# EAGLE board fmc-host - panel (EAGLE 9.5.1), part 1 of 10
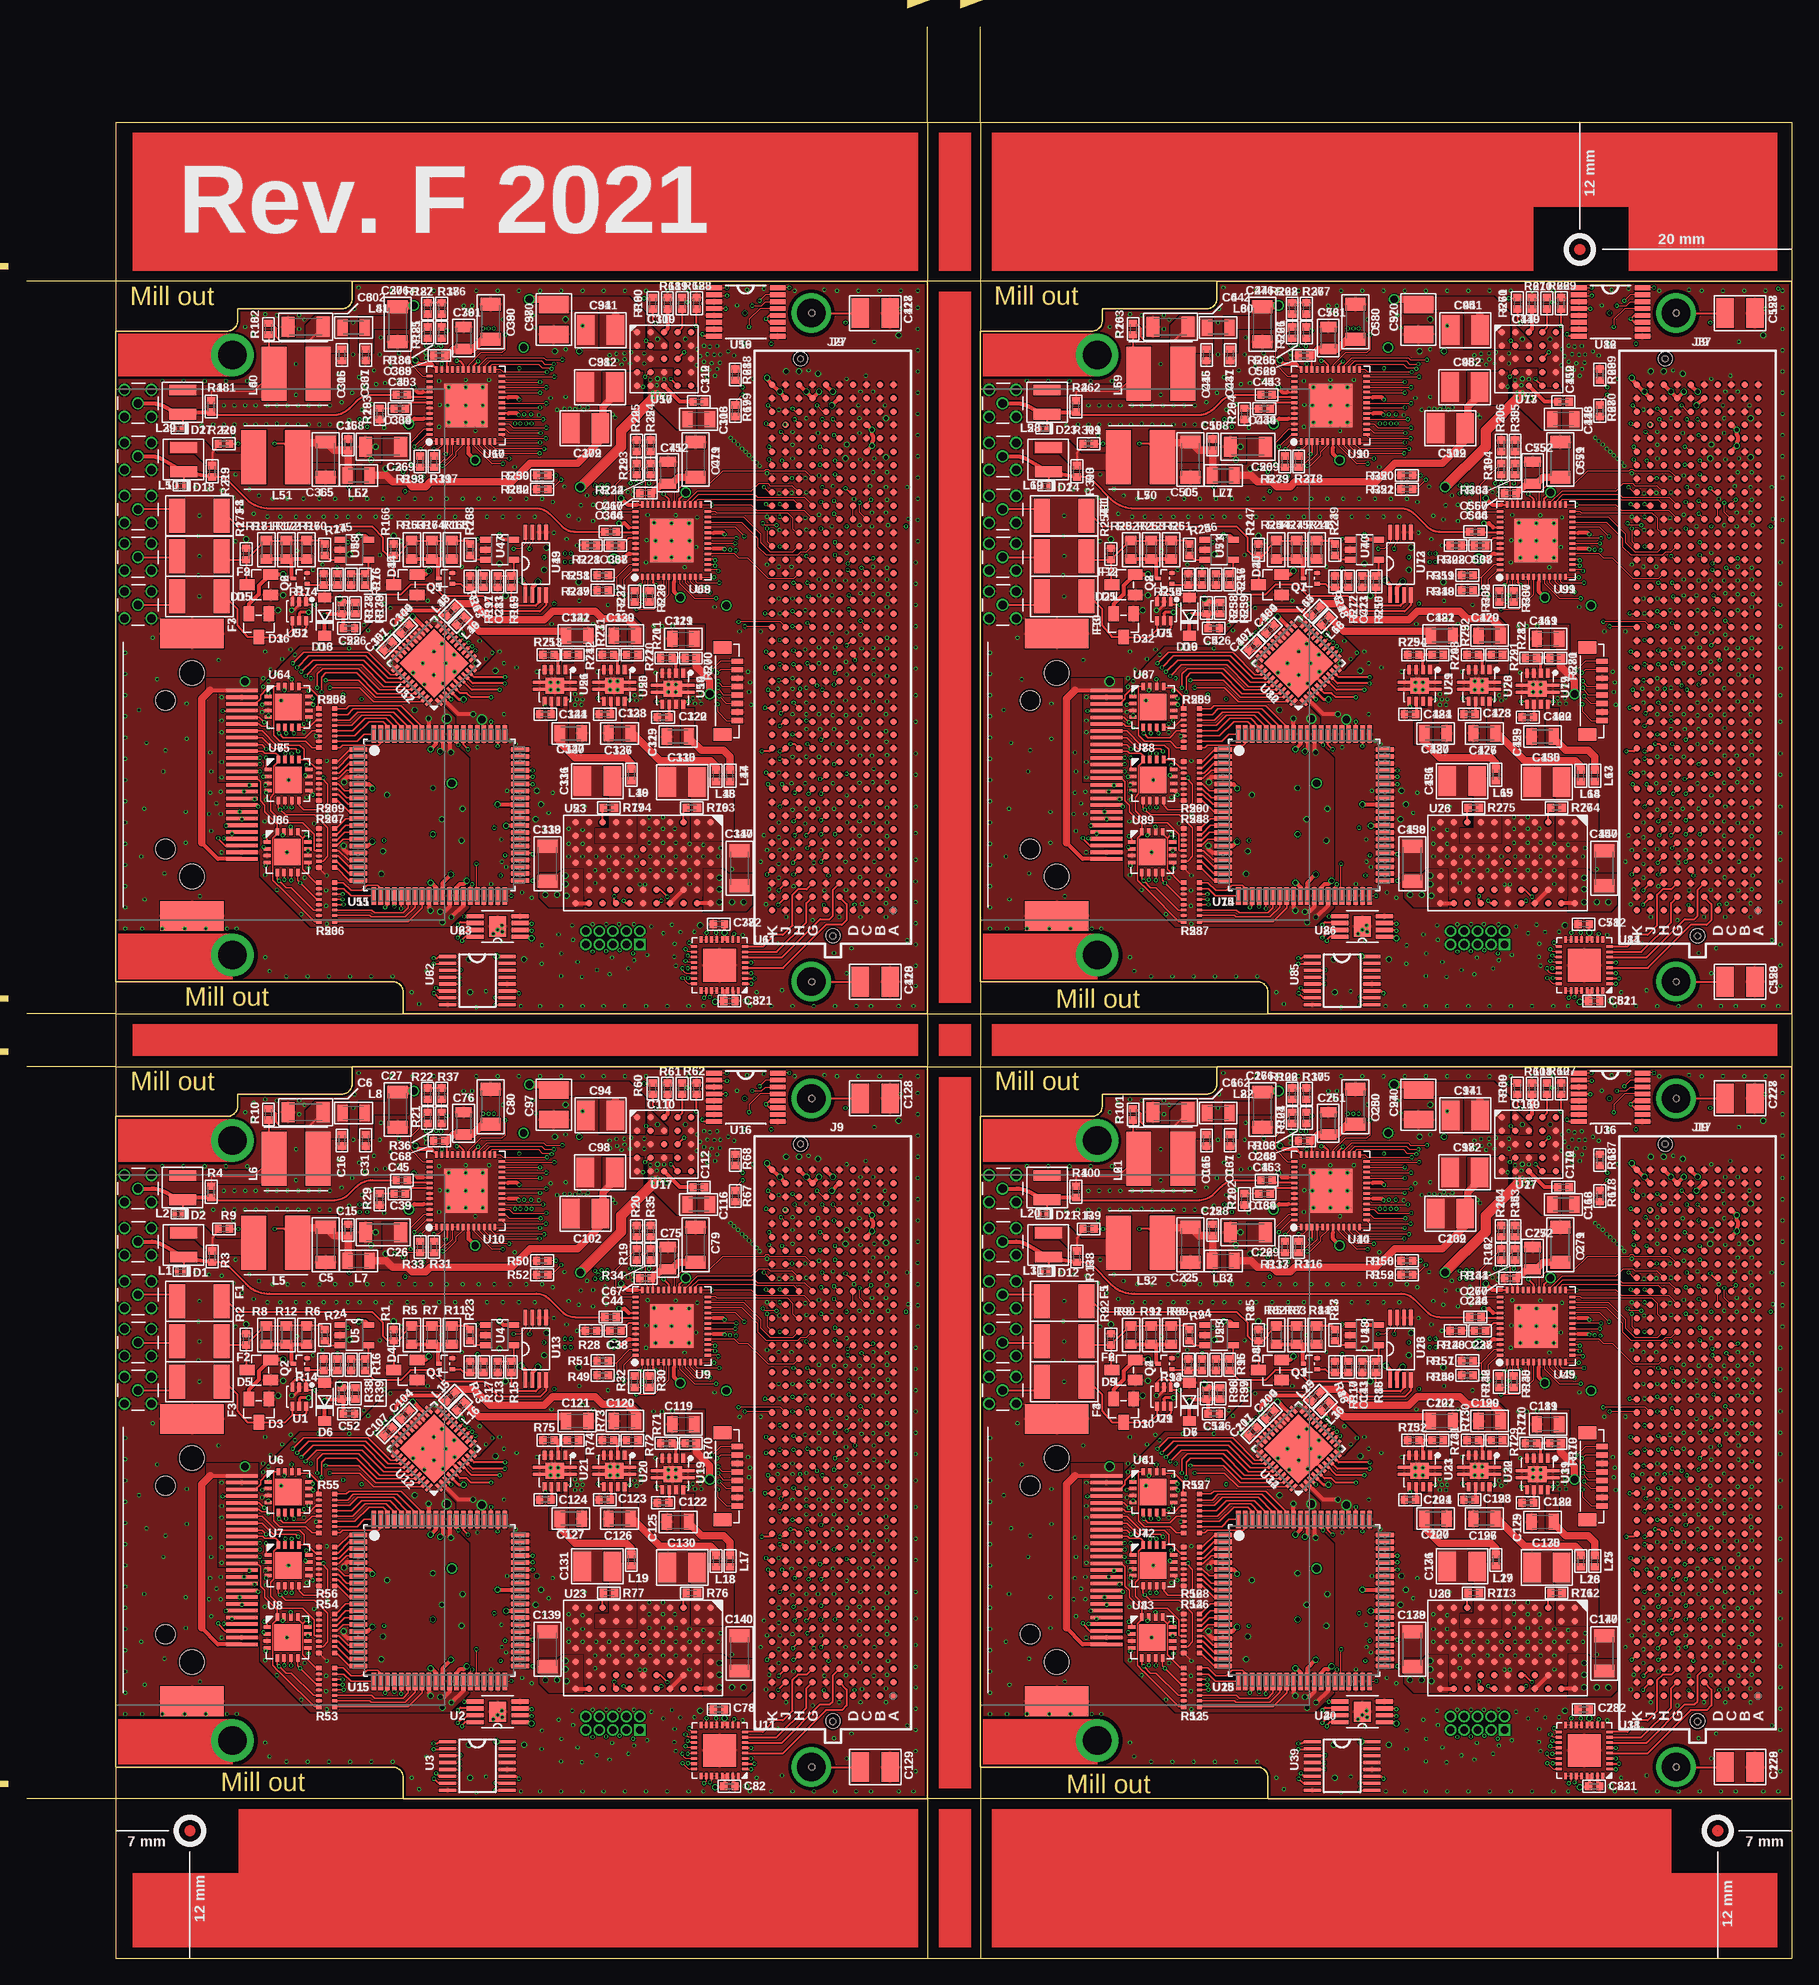
[diagram p0: board, top side]
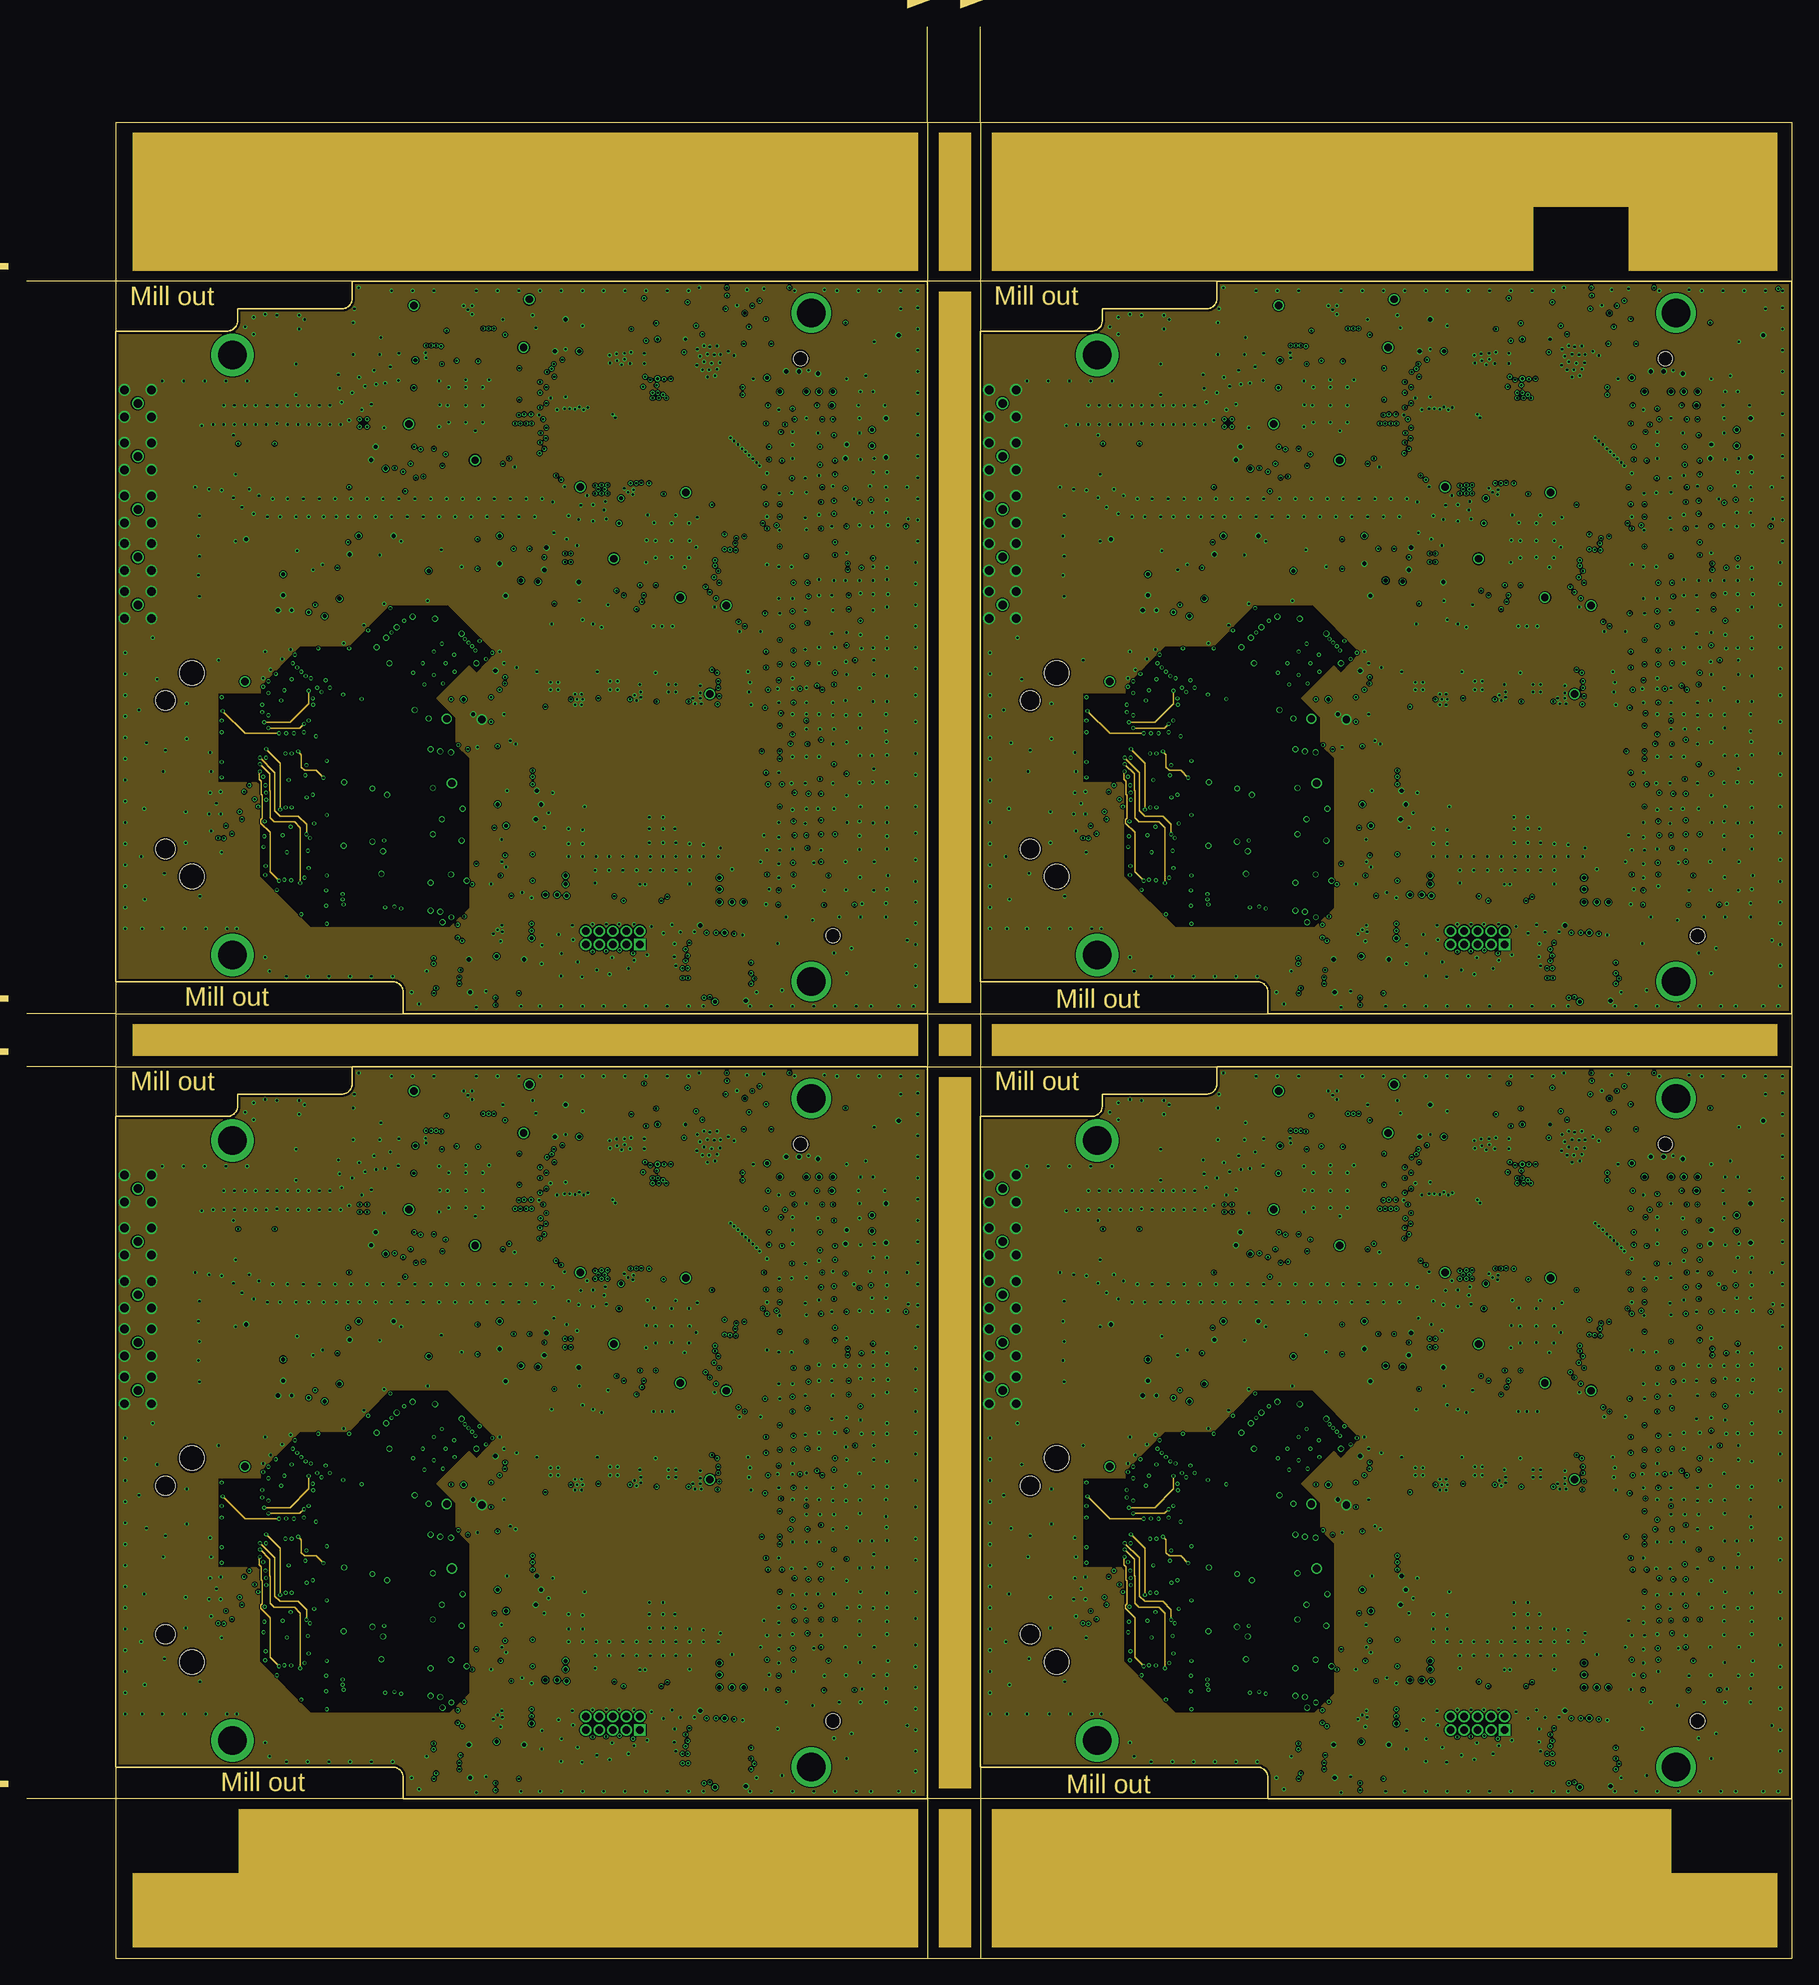
[diagram p1: board, inner layer GND1]
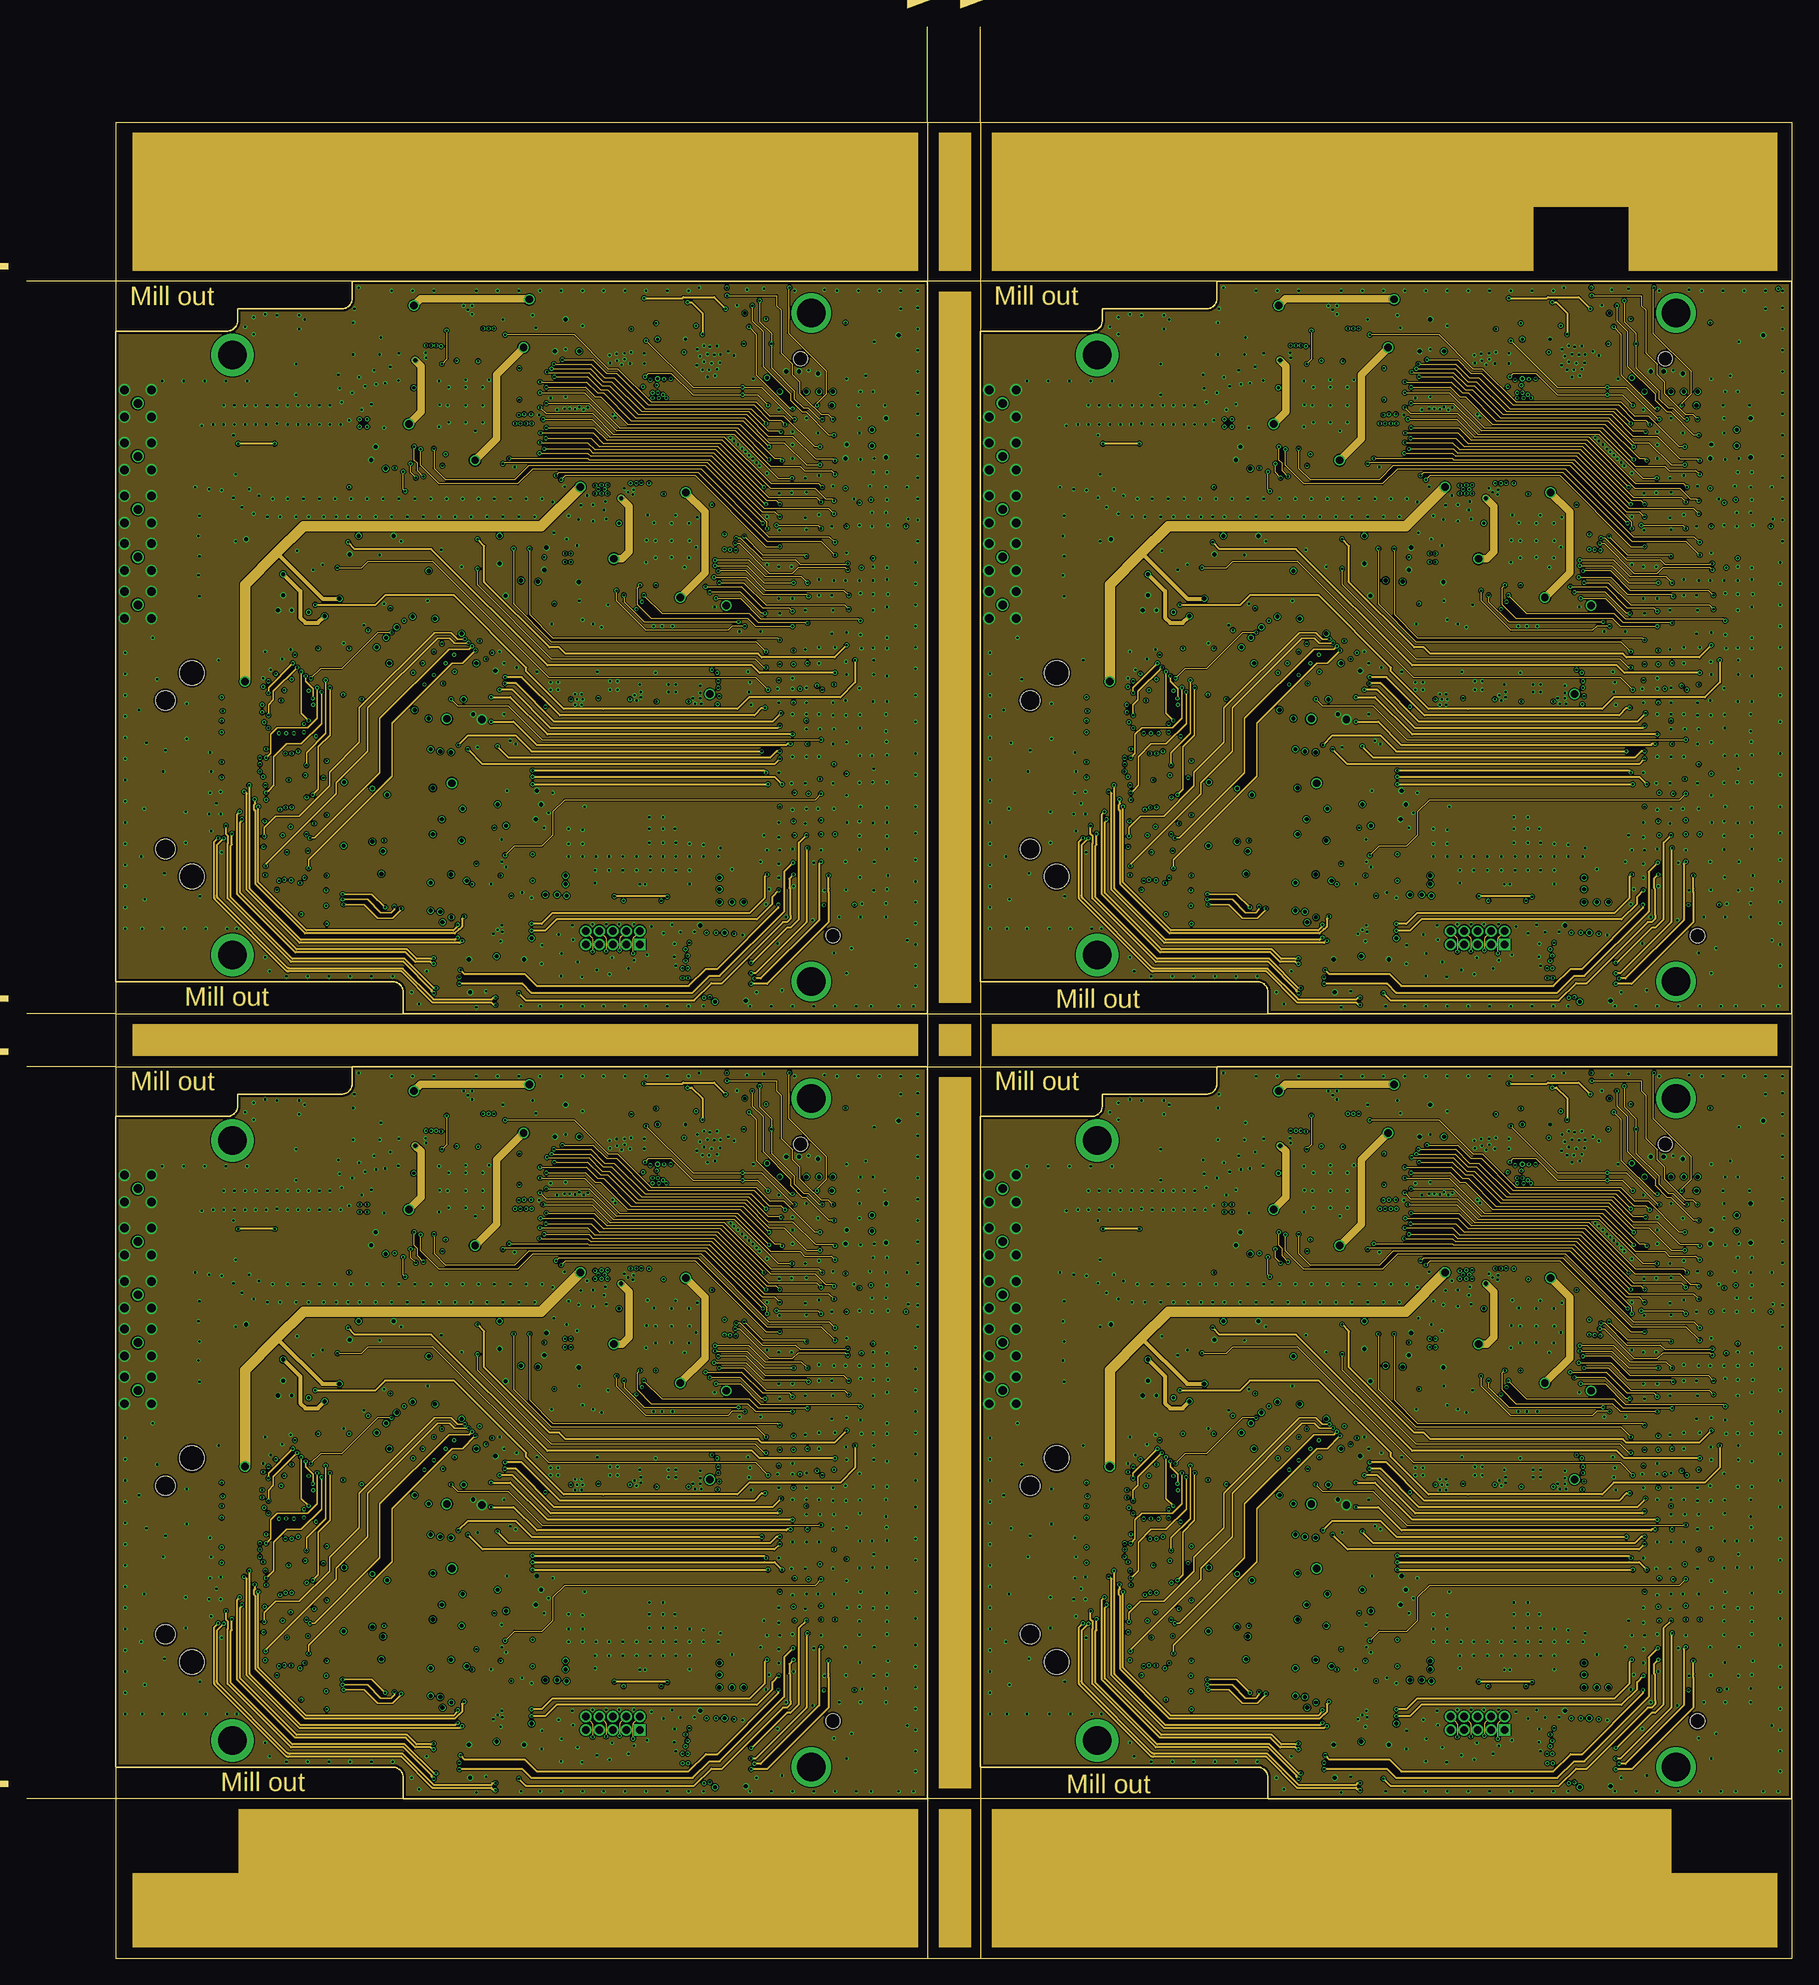
[diagram p2: board, inner layer Highspeed2]
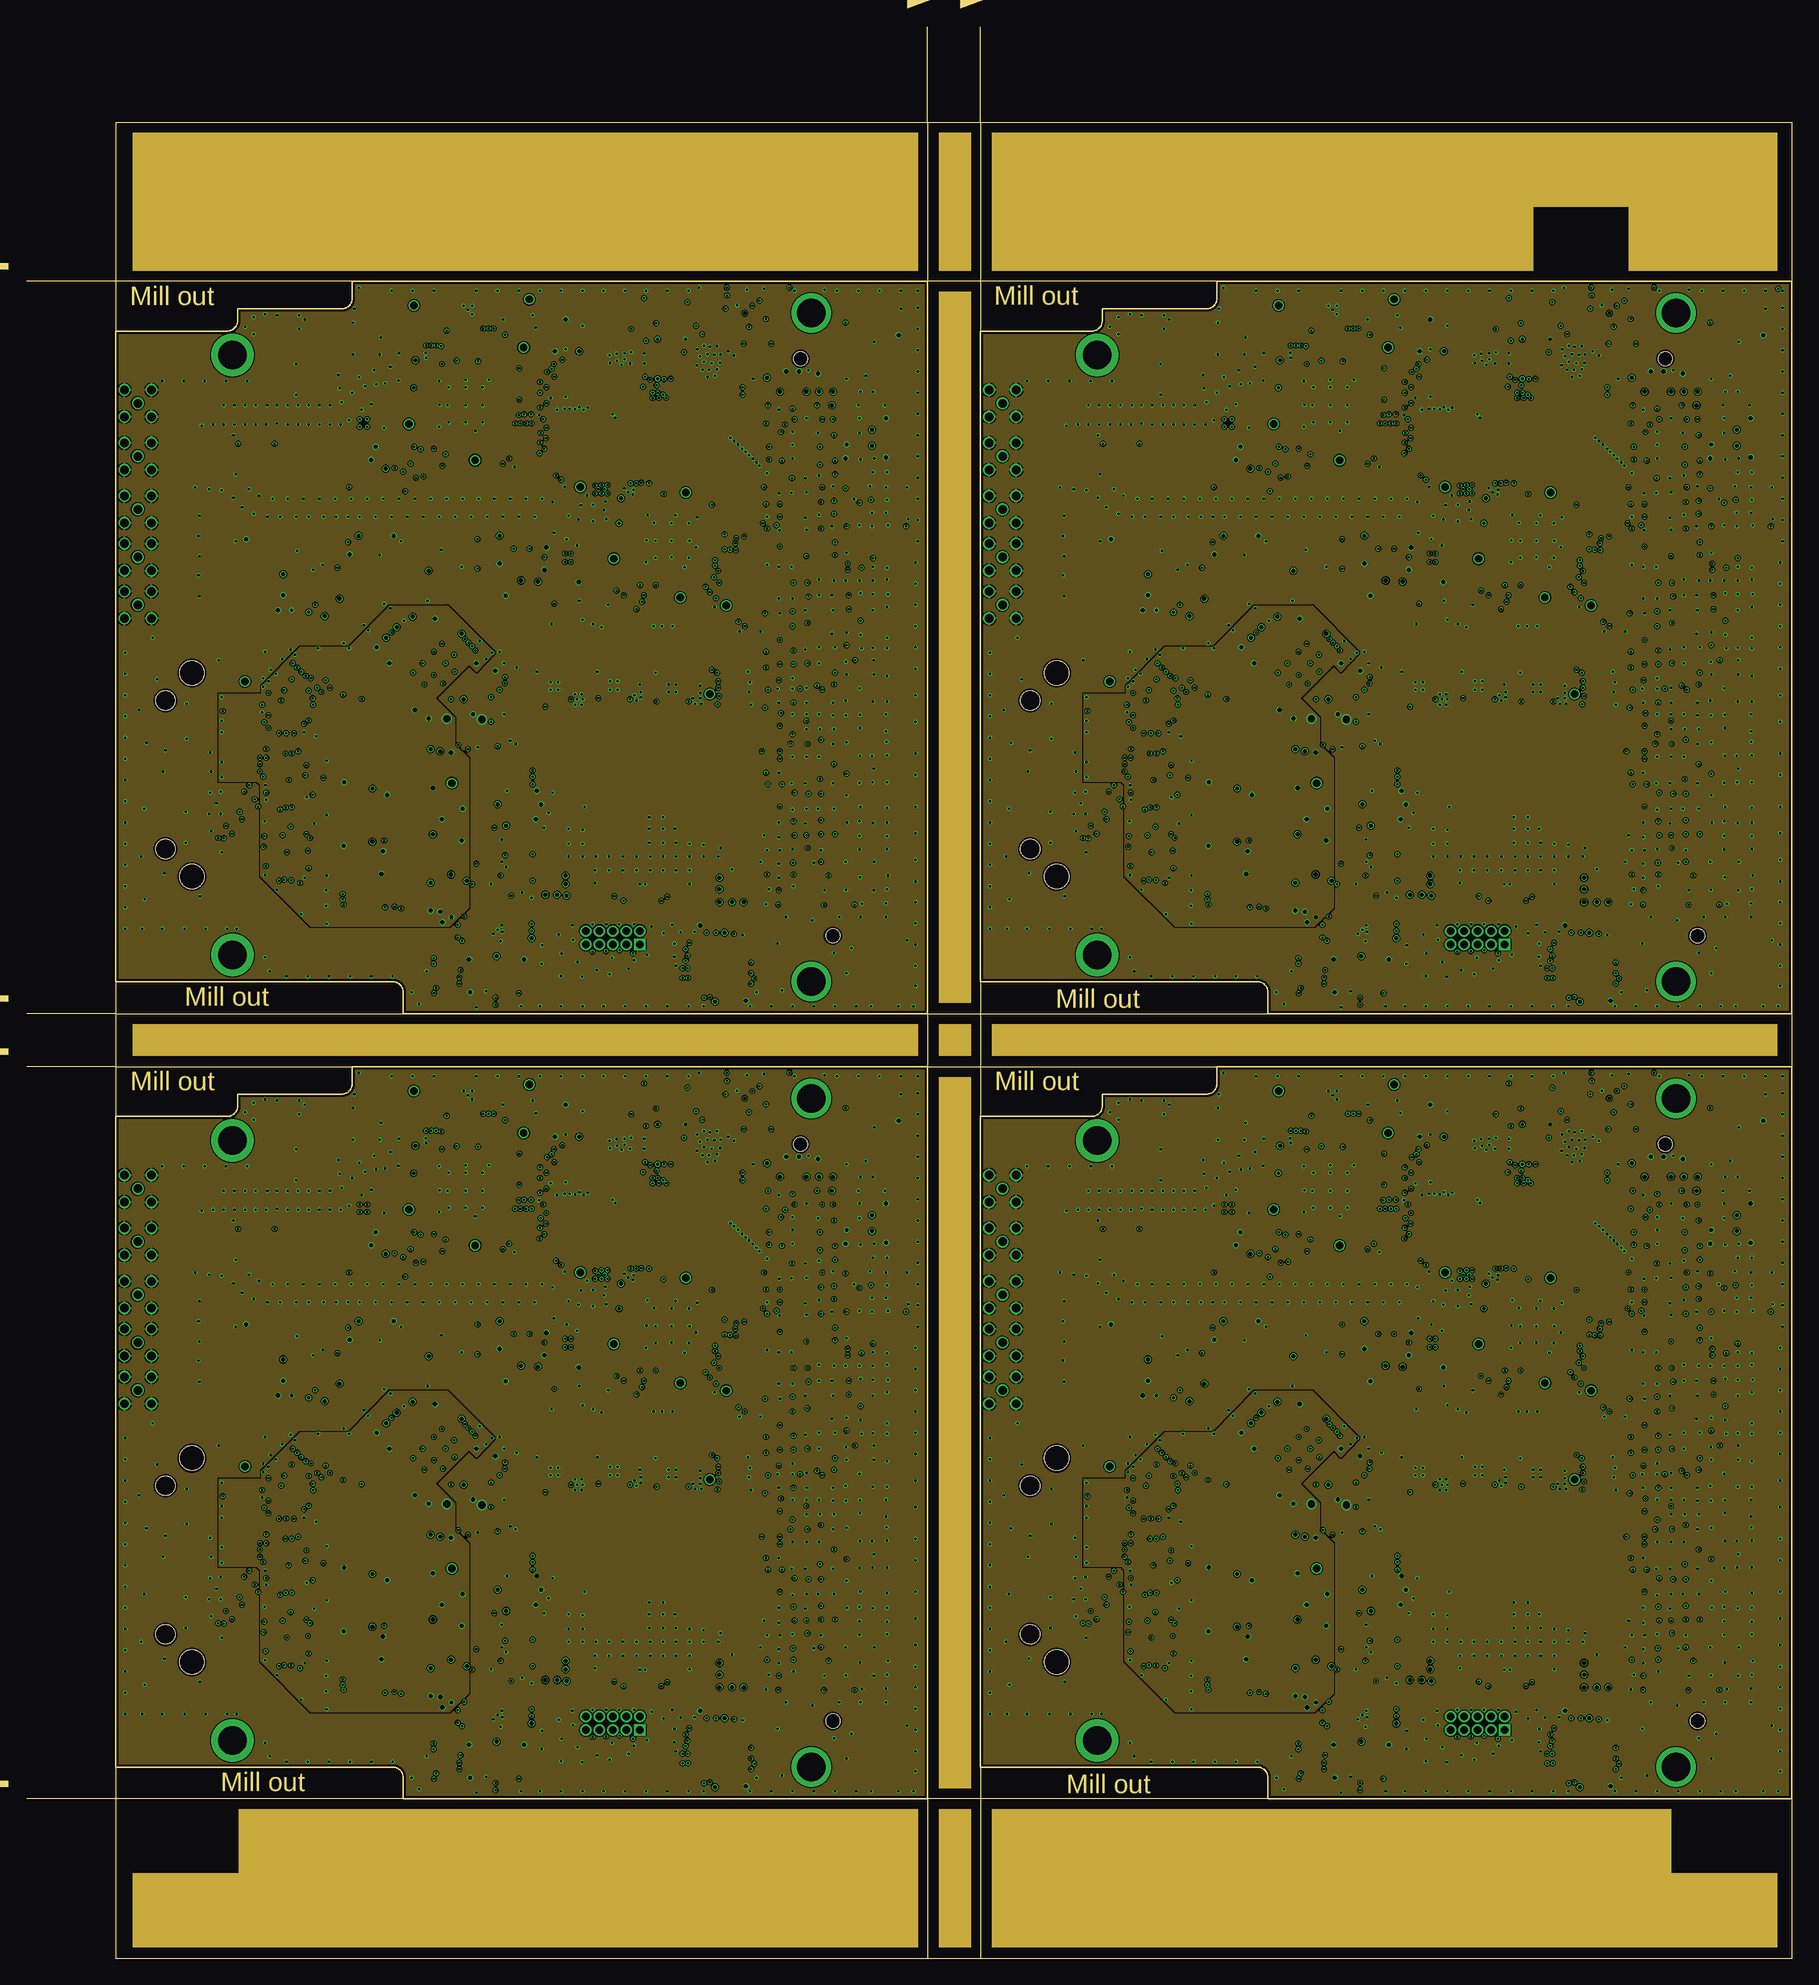
[diagram p3: board, inner layer GND3]
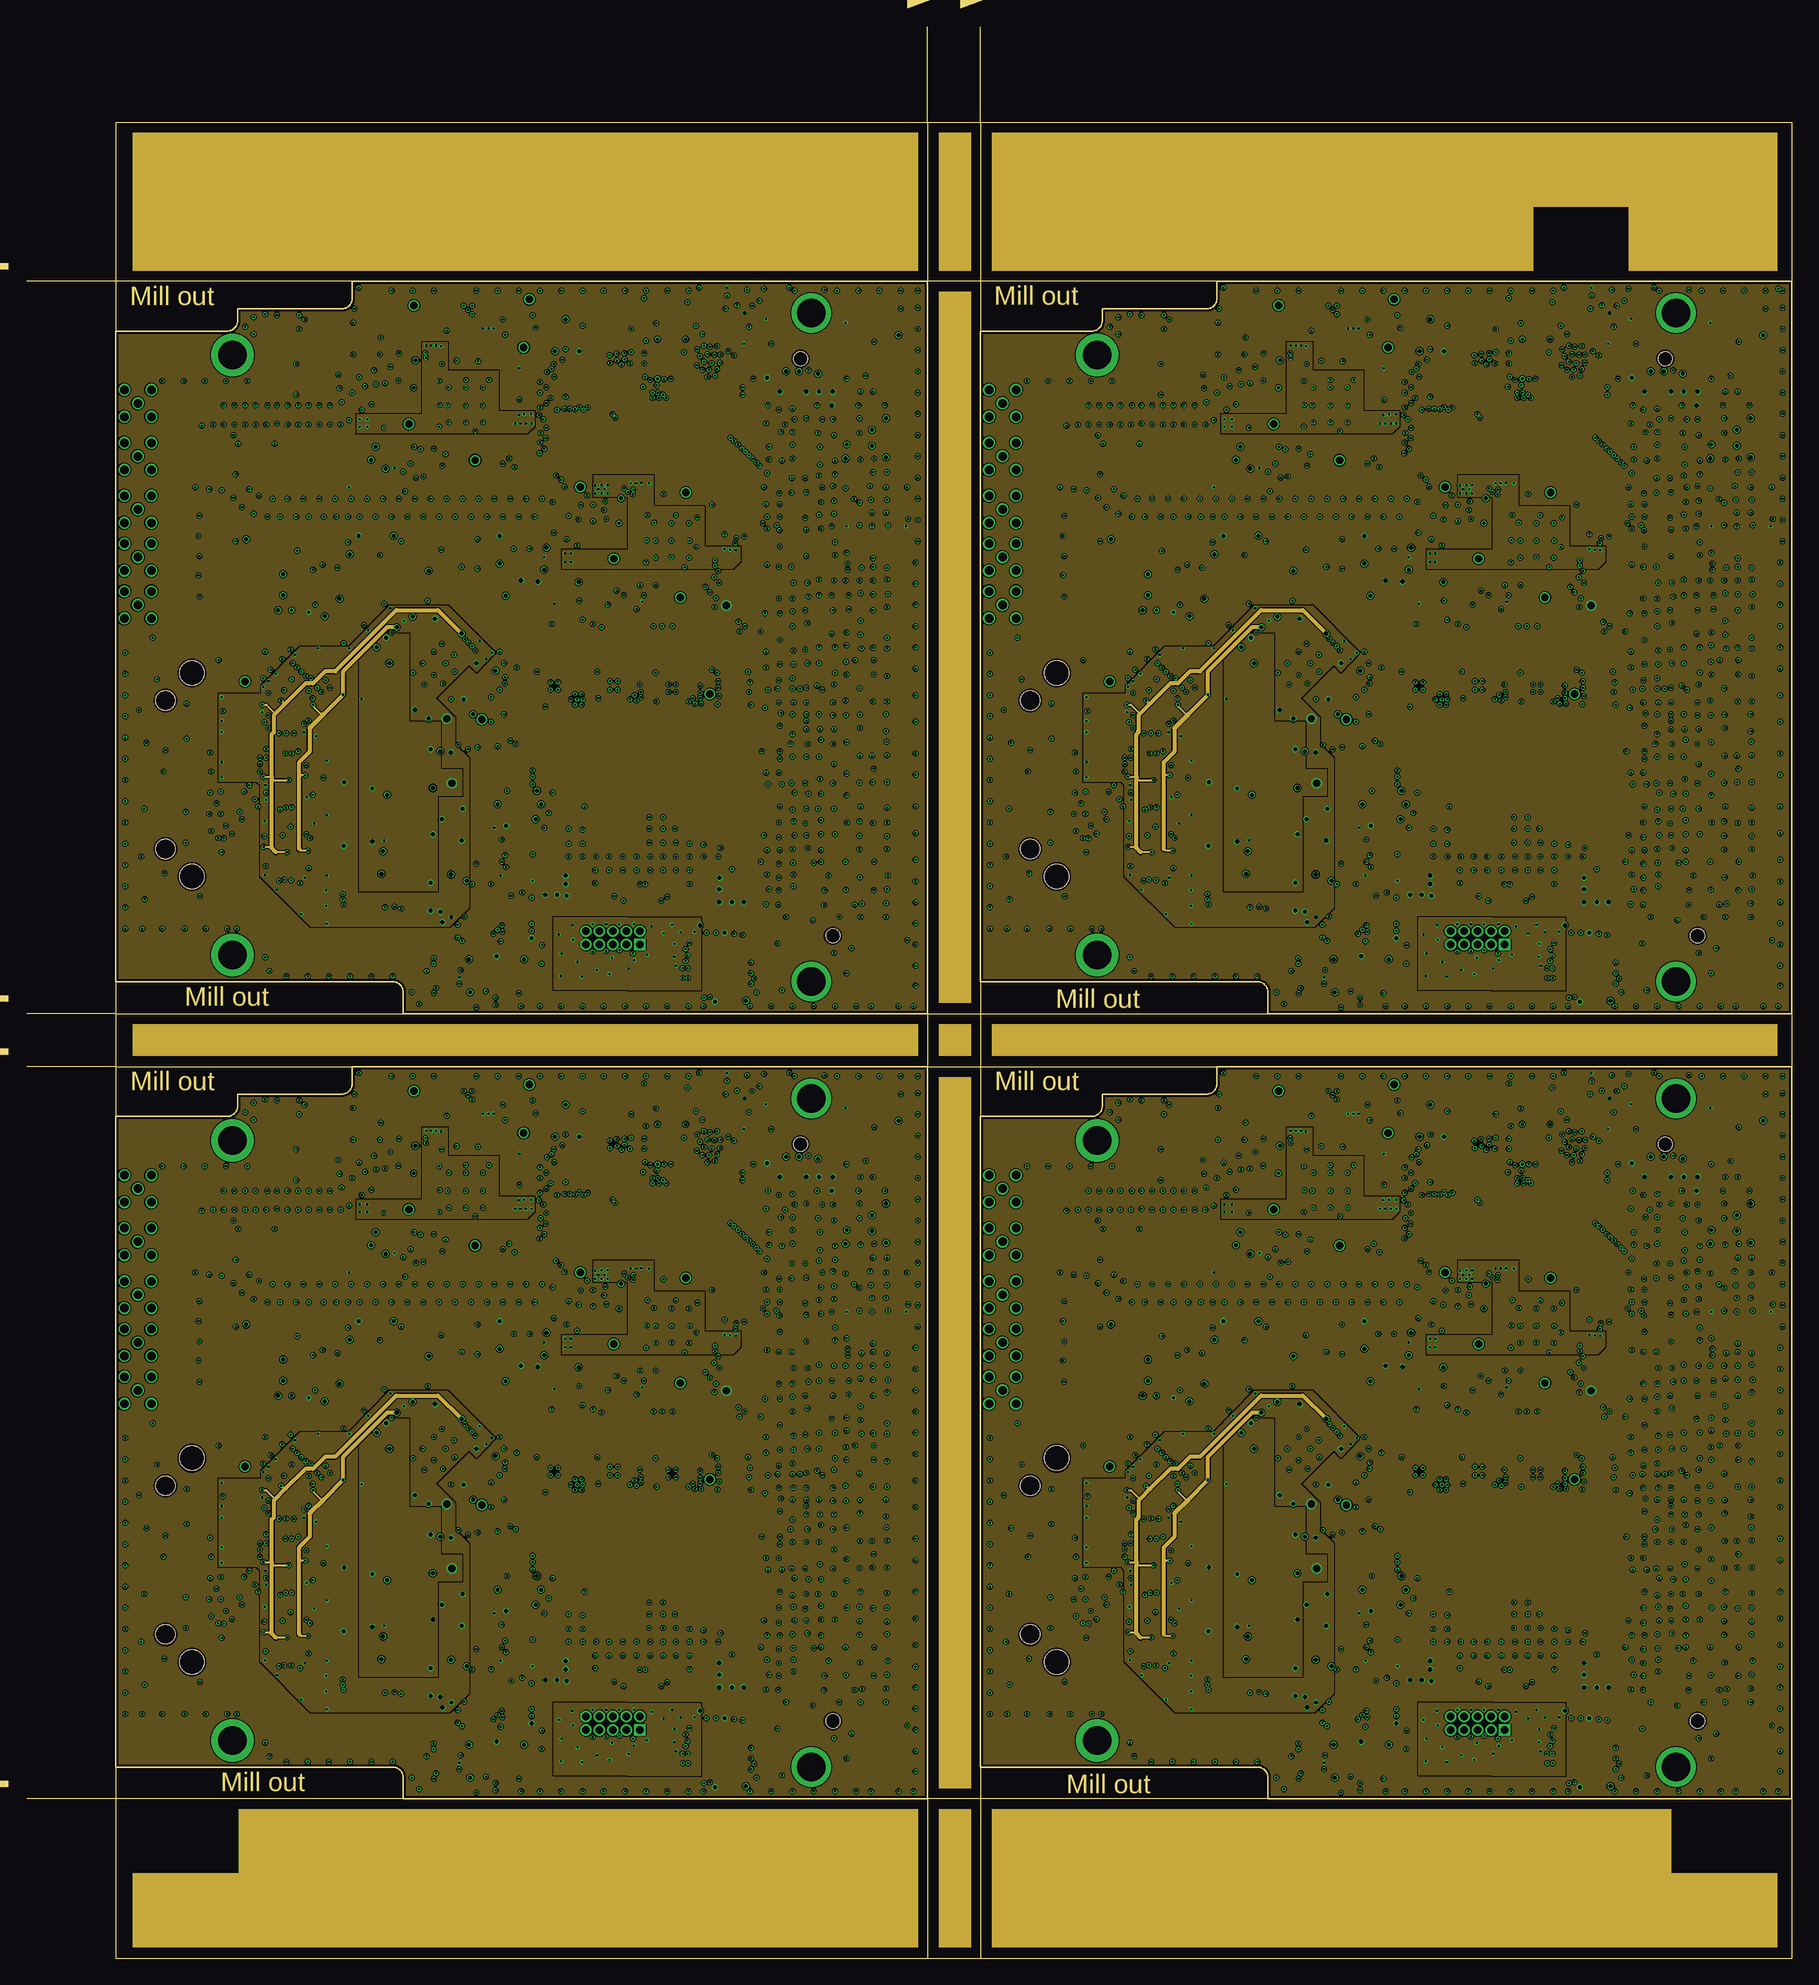
[diagram p4: board, inner layer VCC]
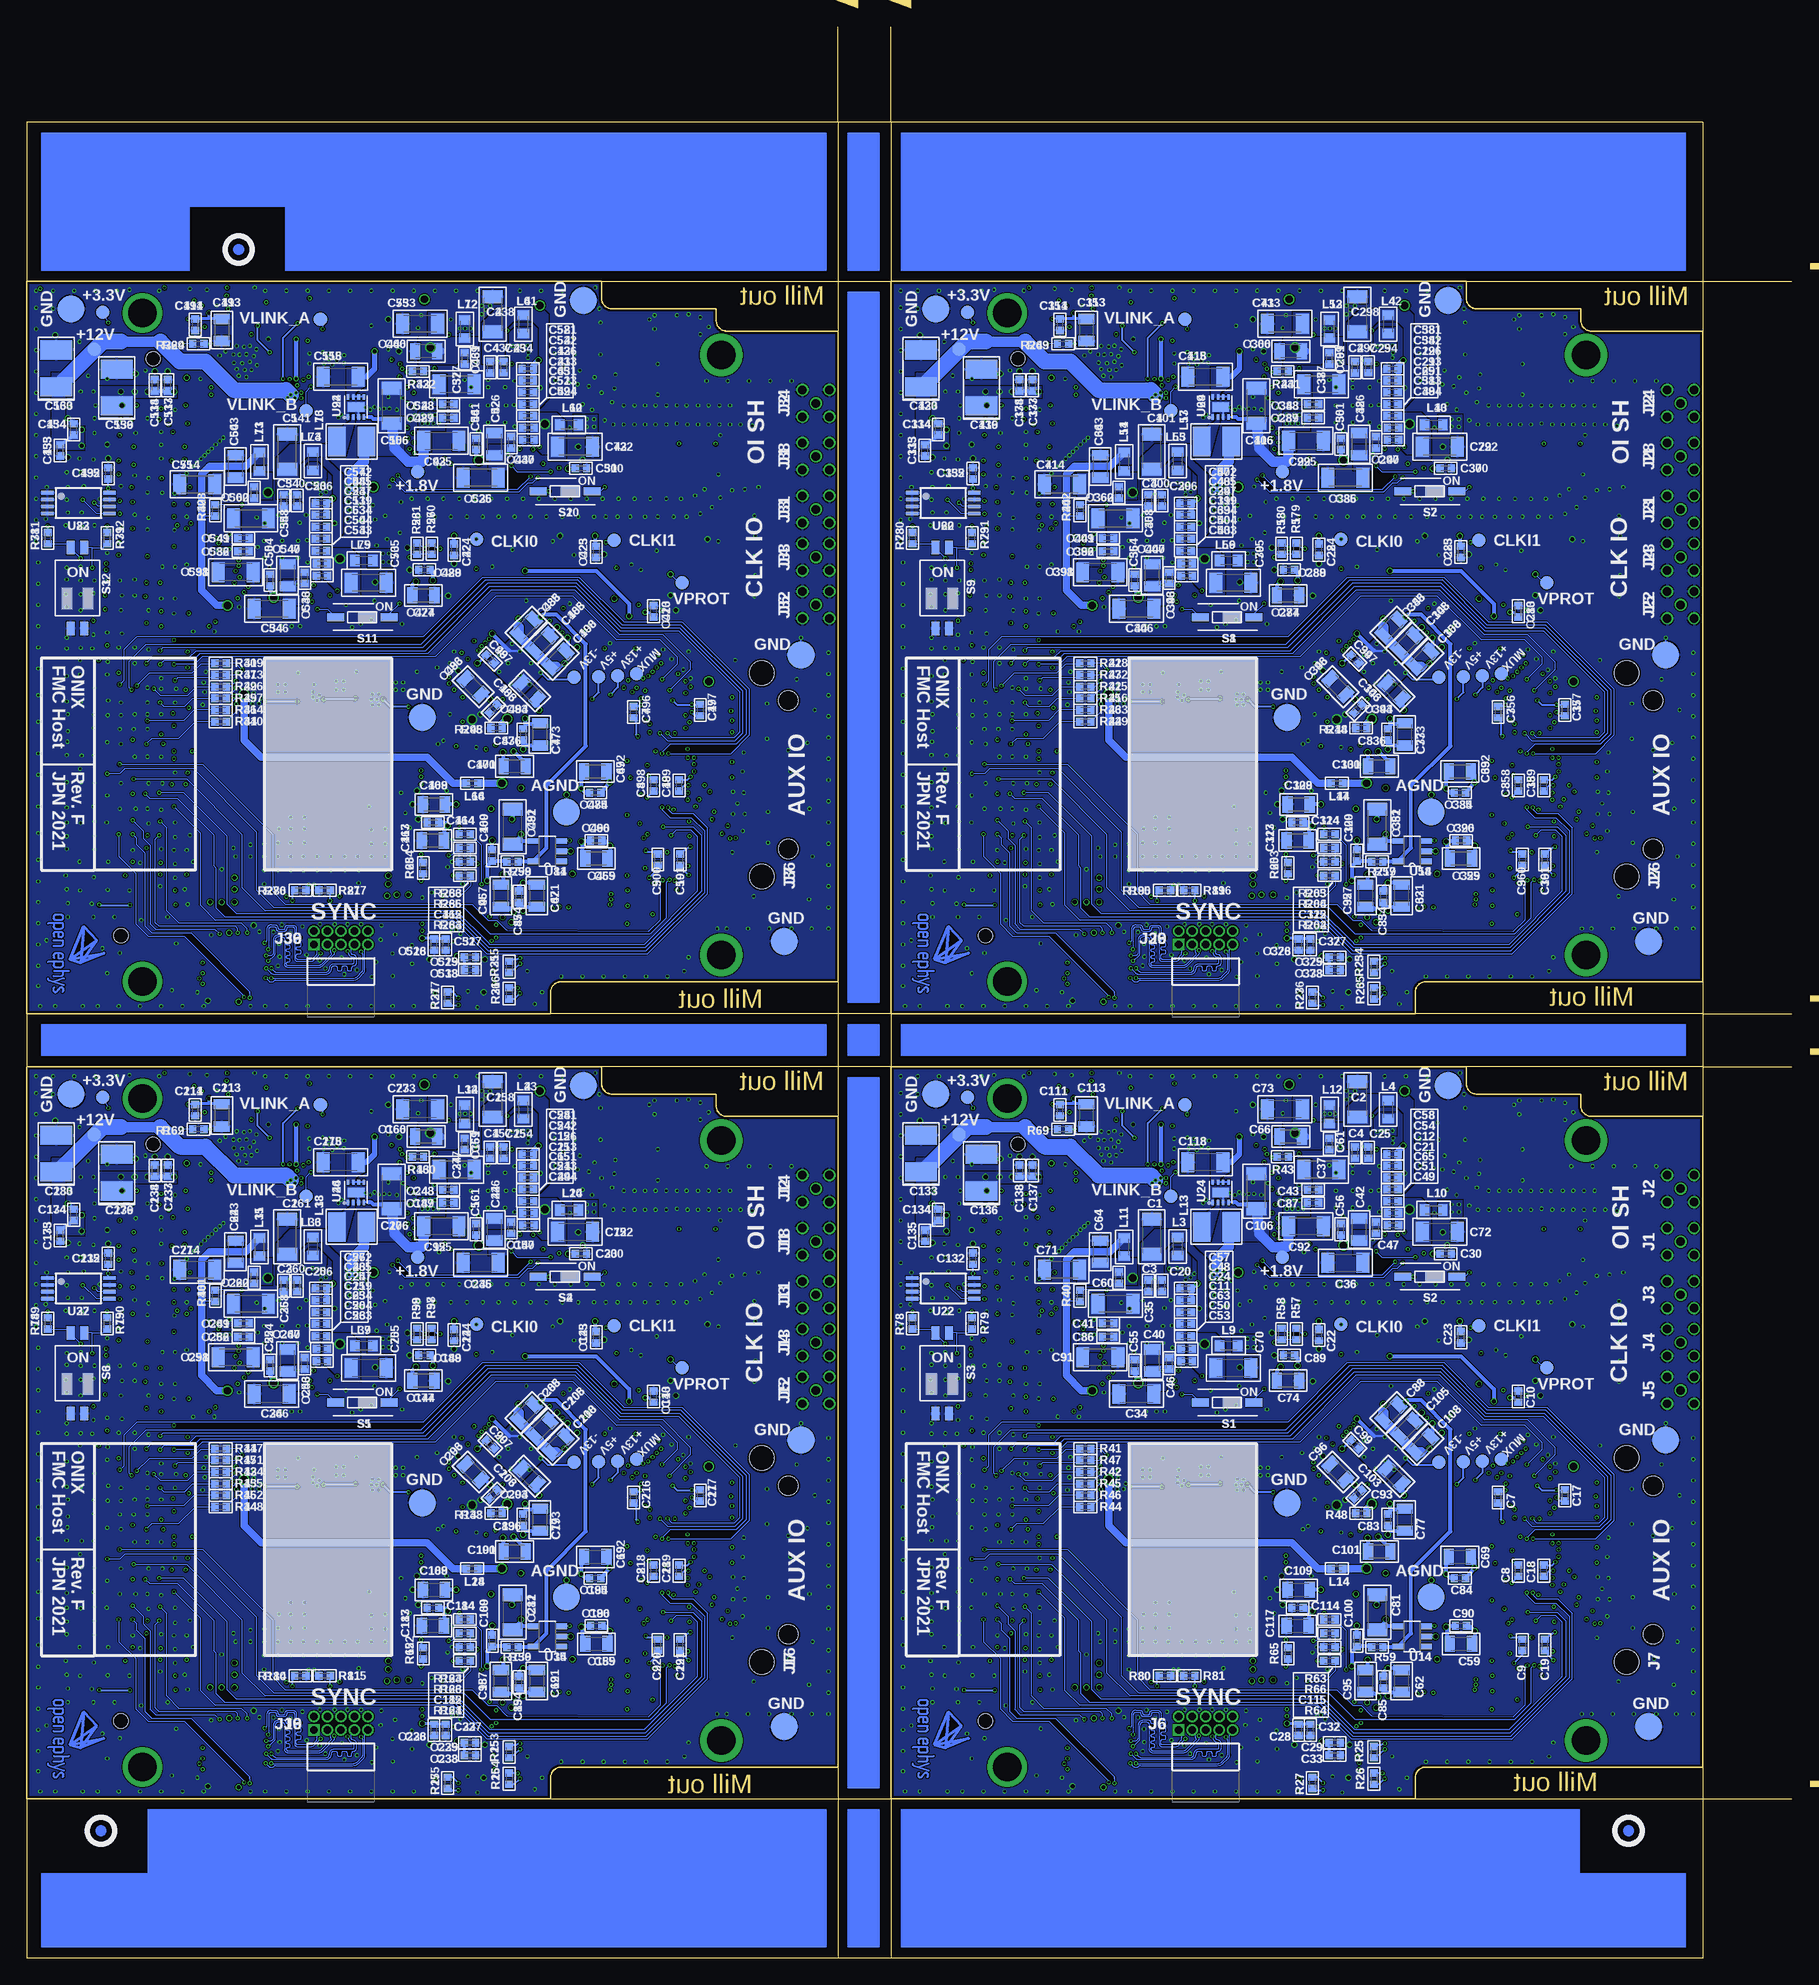
[diagram p5: board, bottom side, seen from below]

Size 166.4 x 182 mm. Coordinates in mm from the lower left corner, seen from the top.
Outline: 84.9,0 8.4,0 8.4,15
Outline: 84.9,0 89.9,0
Outline: 89.9,0 166.4,0 166.4,15
Outline: 8.4,158 8.4,173 84.9,173
Outline: 8.4,158 8.4,89
Outline: 8.4,89 8.4,84
Outline: 8.4,84 8.4,15
Outline: 84.9,173 89.9,173
Outline: 89.9,173 166.4,173 166.4,158
Outline: 166.4,158 166.4,89
Outline: 166.4,89 166.4,84
Outline: 166.4,84 166.4,15
Outline: 8.4,84 166.4,84
Outline: 8.4,89 166.4,89
Outline: 84.9,173 84.9,0
Outline: 89.9,173 89.9,0
Outline: 166.4,15 8.4,15
Outline: 166.4,158 8.4,158
Outline: 8.4,15 0,15
Outline: 8.4,84 0,84
Outline: 8.4,89 0,89
Outline: 8.4,158 0,158
Outline: 84.9,173 84.9,182
Outline: 89.9,173 89.9,182
Copper layers (1+2*3+4*5+16): Top/HighSpeed 0.035mm / dielectric 0.1mm / GND1 0.0175mm / dielectric 0.565mm / Highspeed2 0.0175mm / dielectric 5mil / GND3 0.0175mm / dielectric 0.565mm / VCC 0.0175mm / dielectric 0.1mm / Bottom/LowSpeed 0.035mm
Design rules "jlcpcb-6-layer *": minimum track width 3.5mil, minimum drill 0.2mm, track to track 3.5mil, track to pad 3.5mil, pad to pad 3.5mil, via to via 5mil, smd to smd 0mil, copper to edge 0.2mm, drill to drill 5mil, minimum pad ring 3mil, minimum via ring 3mil, stop-mask expansion 0mil, vias tented up to drill 100mil, thermal gap 0.12mm
Net classes: 1 130 Ohm Diff Top: width 0.09 mm, drill 0.2 mm, clearance 0.089 mm; 2 50 Ohm Single Top: width 0.15 mm, drill 0.2 mm; 3 100 Ohm Diff Mid: width 0.19 mm, drill 0.2 mm, clearance 0.09 mm; 4 50 Ohm Single Mid: width 0.2 mm, drill 0.2 mm; 5 100 Ohm Diff Top: width 0.15 mm, drill 0.2 mm, clearance 0.09 mm; 6 Link: width 0.15 mm, drill 0.2 mm, clearance 0.5 mm; 7 CAN 210 Diff Top: width 0.11 mm, drill 0.2 mm, clearance 0.09 mm
tRestrict: area 8.3,17.9 to 19.6,22.7; area 17.2,18.3 to 21.6,22.7; area 17.3,74.9 to 21.5,79.1; area 8.3,74.9 to 19.6,79.3; area 72,16 to 76,20; area 72,79 to 76,83; area 89.8,17.9 to 101.1,22.7; area 98.7,18.3 to 103.1,22.7; area 98.8,74.9 to 103,79.1; area 89.8,74.9 to 101.1,79.3; area 153.5,16 to 157.5,20; area 153.5,79 to 157.5,83; 12 more areas

## Footprints (pad centres in the part's own frame; a part is rotated, then mirrored left to right if it is on the bottom)
1206 = smd 1.219 x 1.88: 1 -1.651,0; 2 1.651,0
0402 = smd 0.686 x 0.762: 1 -0.533,0; 2 0.533,0
0805 = smd 0.965 x 1.524: 1 -1.041,0; 2 1.041,0
1210 = smd 1.651 x 2.794: 1 -1.397,0; 2 1.397,0
1411-VISHAY-B = smd 1.8 x 3: A -1.725,0; C 1.725,0
0402P-DFN = smd 0.35 x 0.6: A -0.325,0; C 0.325,0
SOT23 = smd 1 x 1.4: 1 -0.95,-1.1; 2 0.95,-1.1; 3 0,1.1
SOD123 = smd 0.914 x 1.219: A -1.8,0; C 1.8,0
1812 = smd 1.5 x 3.2: 1 -2.1,0; 2 2.1,0
MMCX-THRU = drill 0.8: GND@1 -1.27,1.27; GND@2 -1.27,-1.27; GND@3 1.27,-1.27; GND@4 1.27,1.27; SIG 0,0
FTSH-105-01-F-D-RA-K = drill 0.71 pad 1.06 square: 01 2.54,0.635 | drill 0.71 pad 1.06: 02 2.54,-0.635; 03 1.27,0.635; 04 1.27,-0.635; 05 0,0.635; 06 0,-0.635; 07 -1.27,0.635; 08 -1.27,-0.635; 09 -2.54,0.635; 10 -2.54,-0.635
12226-82X0-00XX = smd 0.335 x 3: 1 7.938,7.2; 2 6.668,7.2; 3 5.397,7.2; 4 4.128,7.2; 5 2.857,7.2; 6 1.587,7.2; 7 0.318,7.2; 8 -0.953,7.2; 9 -2.223,7.2; 10 -3.493,7.2; 11 -4.763,7.2; 12 -6.032,7.2; 13 -7.303,7.2; 14 7.303,7.2; 15 6.032,7.2; 16 4.763,7.2; 17 3.493,7.2; 18 2.223,7.2; 19 0.953,7.2; 20 -0.318,7.2; 21 -1.587,7.2; 22 -2.857,7.2; 23 -4.128,7.2; 24 -5.397,7.2; 25 -6.668,7.2; 26 -7.938,7.2 | smd 2.8 x 6: PAD1 -13.3,2.5; PAD2 13.3,2.5 | hole 1.8: 7,0; -7,0 | hole 2.3: 9.6,2.5; -9.6,2.5
FMC_SINGLE_WIDTH_MODULE = drill 2.7 pad 4: BEZ1 -54.6,59.05; BEZ2 -54.6,2.5
FMC_HPC_MALE = smd 0.635 x 0.635: A1 24.765,5.715; A2 23.495,5.715; A3 22.225,5.715; A4 20.955,5.715; A5 19.685,5.715; A6 18.415,5.715; A7 17.145,5.715; A8 15.875,5.715; A9 14.605,5.715; A10 13.335,5.715; A11 12.065,5.715; A12 10.795,5.715; A13 9.525,5.715; A14 8.255,5.715; A15 6.985,5.715; A16 5.715,5.715; A17 4.445,5.715; A18 3.175,5.715; A19 1.905,5.715; A20 0.635,5.715; A21 -0.635,5.715; A22 -1.905,5.715; A23 -3.175,5.715; A24 -4.445,5.715; A25 -5.715,5.715; A26 -6.985,5.715; A27 -8.255,5.715; A28 -9.525,5.715; A29 -10.795,5.715; A30 -12.065,5.715; A31 -13.335,5.715; A32 -14.605,5.715; A33 -15.875,5.715; A34 -17.145,5.715; A35 -18.415,5.715; A36 -19.685,5.715; A37 -20.955,5.715; A38 -22.225,5.715; A39 -23.495,5.715; A40 -24.765,5.715; B1 24.765,4.445; B2 23.495,4.445; B3 22.225,4.445; B4 20.955,4.445; B5 19.685,4.445; B6 18.415,4.445; B7 17.145,4.445; B8 15.875,4.445; B9 14.605,4.445; B10 13.335,4.445; B11 12.065,4.445; B12 10.795,4.445; B13 9.525,4.445; B14 8.255,4.445; B15 6.985,4.445; B16 5.715,4.445; B17 4.445,4.445; B18 3.175,4.445; B19 1.905,4.445; B20 0.635,4.445; B21 -0.635,4.445; B22 -1.905,4.445; B23 -3.175,4.445; B24 -4.445,4.445; B25 -5.715,4.445; B26 -6.985,4.445; B27 -8.255,4.445; B28 -9.525,4.445; B29 -10.795,4.445; B30 -12.065,4.445; B31 -13.335,4.445; B32 -14.605,4.445; B33 -15.875,4.445; B34 -17.145,4.445; B35 -18.415,4.445; B36 -19.685,4.445; B37 -20.955,4.445; B38 -22.225,4.445; B39 -23.495,4.445; B40 -24.765,4.445; C1 24.765,3.175; C2 23.495,3.175; C3 22.225,3.175; C4 20.955,3.175; C5 19.685,3.175; C6 18.415,3.175; C7 17.145,3.175; C8 15.875,3.175; C9 14.605,3.175; C10 13.335,3.175; C11 12.065,3.175; C12 10.795,3.175; C13 9.525,3.175; C14 8.255,3.175; C15 6.985,3.175; C16 5.715,3.175; C17 4.445,3.175; C18 3.175,3.175; C19 1.905,3.175; C20 0.635,3.175; C21 -0.635,3.175; C22 -1.905,3.175; C23 -3.175,3.175; C24 -4.445,3.175; C25 -5.715,3.175; C26 -6.985,3.175; C27 -8.255,3.175; C28 -9.525,3.175; C29 -10.795,3.175; C30 -12.065,3.175; C31 -13.335,3.175; C32 -14.605,3.175; C33 -15.875,3.175; C34 -17.145,3.175; C35 -18.415,3.175; C36 -19.685,3.175; C37 -20.955,3.175; C38 -22.225,3.175; C39 -23.495,3.175; C40 -24.765,3.175; D1 24.765,1.905; D2 23.495,1.905; D3 22.225,1.905; D4 20.955,1.905; D5 19.685,1.905; D6 18.415,1.905; D7 17.145,1.905; D8 15.875,1.905; D9 14.605,1.905; D10 13.335,1.905; D11 12.065,1.905; D12 10.795,1.905; D13 9.525,1.905; D14 8.255,1.905; D15 6.985,1.905; D16 5.715,1.905; D17 4.445,1.905; D18 3.175,1.905; D19 1.905,1.905; D20 0.635,1.905; D21 -0.635,1.905; D22 -1.905,1.905; D23 -3.175,1.905; D24 -4.445,1.905; D25 -5.715,1.905; D26 -6.985,1.905; D27 -8.255,1.905; D28 -9.525,1.905; D29 -10.795,1.905; D30 -12.065,1.905; D31 -13.335,1.905; D32 -14.605,1.905; D33 -15.875,1.905; D34 -17.145,1.905; D35 -18.415,1.905; D36 -19.685,1.905; D37 -20.955,1.905; D38 -22.225,1.905; D39 -23.495,1.905; D40 -24.765,1.905; E1 24.765,0.635; E2 23.495,0.635; E3 22.225,0.635; E4 20.955,0.635; E5 19.685,0.635; E6 18.415,0.635; E7 17.145,0.635; E8 15.875,0.635; E9 14.605,0.635; E10 13.335,0.635; E11 12.065,0.635; E12 10.795,0.635; E13 9.525,0.635; E14 8.255,0.635; E15 6.985,0.635; E16 5.715,0.635; E17 4.445,0.635; E18 3.175,0.635; E19 1.905,0.635; E20 0.635,0.635; E21 -0.635,0.635; E22 -1.905,0.635; E23 -3.175,0.635; E24 -4.445,0.635; E25 -5.715,0.635; E26 -6.985,0.635; E27 -8.255,0.635; E28 -9.525,0.635; E29 -10.795,0.635; E30 -12.065,0.635; E31 -13.335,0.635; E32 -14.605,0.635; E33 -15.875,0.635; E34 -17.145,0.635; E35 -18.415,0.635; E36 -19.685,0.635; E37 -20.955,0.635; E38 -22.225,0.635; E39 -23.495,0.635; E40 -24.765,0.635; F1 24.765,-0.635; F2 23.495,-0.635; F3 22.225,-0.635; F4 20.955,-0.635; F5 19.685,-0.635; F6 18.415,-0.635; F7 17.145,-0.635; F8 15.875,-0.635; F9 14.605,-0.635; F10 13.335,-0.635; F11 12.065,-0.635; F12 10.795,-0.635; F13 9.525,-0.635; F14 8.255,-0.635; F15 6.985,-0.635; F16 5.715,-0.635; F17 4.445,-0.635; F18 3.175,-0.635; F19 1.905,-0.635; F20 0.635,-0.635; F21 -0.635,-0.635; F22 -1.905,-0.635; F23 -3.175,-0.635; F24 -4.445,-0.635; F25 -5.715,-0.635; F26 -6.985,-0.635; F27 -8.255,-0.635; F28 -9.525,-0.635; F29 -10.795,-0.635; F30 -12.065,-0.635; F31 -13.335,-0.635; F32 -14.605,-0.635; F33 -15.875,-0.635; F34 -17.145,-0.635; F35 -18.415,-0.635; F36 -19.685,-0.635; F37 -20.955,-0.635; F38 -22.225,-0.635; F39 -23.495,-0.635; F40 -24.765,-0.635; G1 24.765,-1.905; G2 23.495,-1.905; G3 22.225,-1.905; G4 20.955,-1.905; G5 19.685,-1.905; G6 18.415,-1.905; G7 17.145,-1.905; G8 15.875,-1.905; G9 14.605,-1.905; G10 13.335,-1.905; G11 12.065,-1.905; G12 10.795,-1.905; G13 9.525,-1.905; G14 8.255,-1.905; G15 6.985,-1.905; G16 5.715,-1.905; G17 4.445,-1.905; G18 3.175,-1.905; G19 1.905,-1.905; G20 0.635,-1.905; G21 -0.635,-1.905; G22 -1.905,-1.905; G23 -3.175,-1.905; G24 -4.445,-1.905; G25 -5.715,-1.905; G26 -6.985,-1.905; G27 -8.255,-1.905; G28 -9.525,-1.905; G29 -10.795,-1.905; G30 -12.065,-1.905; G31 -13.335,-1.905; G32 -14.605,-1.905; G33 -15.875,-1.905; G34 -17.145,-1.905; G35 -18.415,-1.905; G36 -19.685,-1.905; G37 -20.955,-1.905; G38 -22.225,-1.905; G39 -23.495,-1.905; G40 -24.765,-1.905; H1 24.765,-3.175; H2 23.495,-3.175; H3 22.225,-3.175; H4 20.955,-3.175; H5 19.685,-3.175; H6 18.415,-3.175; H7 17.145,-3.175; H8 15.875,-3.175; H9 14.605,-3.175; H10 13.335,-3.175; H11 12.065,-3.175; H12 10.795,-3.175; H13 9.525,-3.175; H14 8.255,-3.175; H15 6.985,-3.175; H16 5.715,-3.175; H17 4.445,-3.175; H18 3.175,-3.175; H19 1.905,-3.175; H20 0.635,-3.175; H21 -0.635,-3.175; H22 -1.905,-3.175; H23 -3.175,-3.175; H24 -4.445,-3.175; H25 -5.715,-3.175; H26 -6.985,-3.175; H27 -8.255,-3.175; H28 -9.525,-3.175; H29 -10.795,-3.175; H30 -12.065,-3.175; H31 -13.335,-3.175; H32 -14.605,-3.175; H33 -15.875,-3.175; H34 -17.145,-3.175; H35 -18.415,-3.175; H36 -19.685,-3.175; H37 -20.955,-3.175; H38 -22.225,-3.175; H39 -23.495,-3.175; H40 -24.765,-3.175; J1 24.765,-4.445; J2 23.495,-4.445; J3 22.225,-4.445; J4 20.955,-4.445; J5 19.685,-4.445; J6 18.415,-4.445; J7 17.145,-4.445; J8 15.875,-4.445; J9 14.605,-4.445; J10 13.335,-4.445; J11 12.065,-4.445; J12 10.795,-4.445; J13 9.525,-4.445; J14 8.255,-4.445; J15 6.985,-4.445; J16 5.715,-4.445; J17 4.445,-4.445; J18 3.175,-4.445; J19 1.905,-4.445; J20 0.635,-4.445; J21 -0.635,-4.445; J22 -1.905,-4.445; J23 -3.175,-4.445; J24 -4.445,-4.445; J25 -5.715,-4.445; J26 -6.985,-4.445; J27 -8.255,-4.445; J28 -9.525,-4.445; J29 -10.795,-4.445; J30 -12.065,-4.445; J31 -13.335,-4.445; J32 -14.605,-4.445; J33 -15.875,-4.445; J34 -17.145,-4.445; J35 -18.415,-4.445; J36 -19.685,-4.445; J37 -20.955,-4.445; J38 -22.225,-4.445; J39 -23.495,-4.445; J40 -24.765,-4.445; K1 24.765,-5.715; K2 23.495,-5.715; K3 22.225,-5.715; K4 20.955,-5.715; K5 19.685,-5.715; K6 18.415,-5.715; K7 17.145,-5.715; K8 15.875,-5.715; K9 14.605,-5.715; K10 13.335,-5.715; K11 12.065,-5.715; K12 10.795,-5.715; K13 9.525,-5.715; K14 8.255,-5.715; K15 6.985,-5.715; K16 5.715,-5.715; K17 4.445,-5.715; K18 3.175,-5.715; K19 1.905,-5.715; K20 0.635,-5.715; K21 -0.635,-5.715; K22 -1.905,-5.715; K23 -3.175,-5.715; K24 -4.445,-5.715; K25 -5.715,-5.715; K26 -6.985,-5.715; K27 -8.255,-5.715; K28 -9.525,-5.715; K29 -10.795,-5.715; K30 -12.065,-5.715; K31 -13.335,-5.715; K32 -14.605,-5.715; K33 -15.875,-5.715; K34 -17.145,-5.715; K35 -18.415,-5.715; K36 -19.685,-5.715; K37 -20.955,-5.715; K38 -22.225,-5.715; K39 -23.495,-5.715; K40 -24.765,-5.715 | drill 2.692: CHASSIS_A -31.496,-2.032; CHASSIS_B 31.496,-2.032 | hole 1.321: 27.165,0; -27.191,-3.05
BM08B-SURS-TF = smd 0.5 x 1.1: 1 -2.8,0; 2 -2,0; 3 -1.2,0; 4 -0.4,0; 5 0.4,0; 6 1.2,0; 7 2,0; 8 2.8,0 | smd 1.2 x 1.7: M1 -4.1,1.4; M2 4.1,1.4
1008PS = smd 2.54 x 1.016: 1 0,1.143; 2 0,-1.143
0603 = smd 0.889 x 1.067: 1 -0.864,0; 2 0.864,0
SRN6045TA = smd 5.1 x 2.35: 1 0,2.075; 2 0,-2.075
SC75 = smd 0.356 x 0.503: 1 -0.508,-0.65; 2 0.508,-0.65; 3 0,0.65
RN2X8-1506 = smd 0.425 x 0.5: 1 -1.837,-0.75; 8 1.837,-0.75; C1 -1.837,0.75; C8 1.837,0.75 | smd 0.25 x 0.5: 2 -1.25,-0.75; 3 -0.75,-0.75; 4 -0.25,-0.75; 5 0.25,-0.75; 6 0.75,-0.75; 7 1.25,-0.75; C2 -1.25,0.75; C3 -0.75,0.75; C4 -0.25,0.75; C5 0.25,0.75; C6 0.75,0.75; C7 1.25,0.75
DIP01-SMD-GULL = smd 0.76 x 1.6: 1 0,-5.08; 2 0,0
CHS-02TB = smd 0.76 x 1.27: 1 -0.635,-3.81; 2 0.635,-3.81; 3 0.635,3.81; 4 -0.635,3.81
B1,27 = smd 1.27 x 1.27: TP 0,0
B2,54 = smd 2.54 x 2.54: TP 0,0
SC70 = smd 0.35 x 0.85: 1 -0.65,-0.9; 2 0,-0.9; 3 0.65,-0.9; 4 0.65,0.9; 5 0,0.9; 6 -0.65,0.9
MSOP-8-PAD-3X3 = smd 1.6 x 0.4: 1 -2.1,0.975; 2 -2.1,0.325; 3 -2.1,-0.325; 4 -2.1,-0.975; 5 2.1,-0.975; 6 2.1,-0.325; 7 2.1,0.325; 8 2.1,0.975 | smd 1.57 x 1.89: PAD 0,0
TSSOP-16 = smd 1.6 x 0.3: 1 -2.8,2.275; 2 -2.8,1.625; 3 -2.8,0.975; 4 -2.8,0.325; 5 -2.8,-0.325; 6 -2.8,-0.975; 7 -2.8,-1.625; 8 -2.8,-2.275; 9 2.8,-2.275; 10 2.8,-1.625; 11 2.8,-0.975; 12 2.8,-0.325; 13 2.8,0.325; 14 2.8,0.975; 15 2.8,1.625; 16 2.8,2.275
SOT-23-5 = smd 0.55 x 1: 1 -0.95,-1.35; 2 0,-1.35; 3 0.95,-1.35; 4 0.95,1.35; 5 -0.95,1.35
QFN16-4X4MM = smd 0.686 x 0.33: 1 -1.925,0.975; 2 -1.925,0.325; 3 -1.925,-0.325; 4 -1.925,-0.975; 9 1.925,-0.975; 10 1.925,-0.325; 11 1.925,0.325; 12 1.925,0.975 | smd 0.33 x 0.686: 5 -0.975,-1.925; 6 -0.325,-1.925; 7 0.325,-1.925; 8 0.975,-1.925; 13 0.975,1.925; 14 0.325,1.925; 15 -0.325,1.925; 16 -0.975,1.925 | smd 2.5 x 2.5: PAD 0,0
WQFN48-7X7-PAD = smd 0.24 x 0.6: 1 2.75,3.4; 2 2.25,3.4; 3 1.75,3.4; 4 1.25,3.4; 5 0.75,3.4; 6 0.25,3.4; 7 -0.25,3.4; 8 -0.75,3.4; 9 -1.25,3.4; 10 -1.75,3.4; 11 -2.25,3.4; 12 -2.75,3.4; 25 -2.75,-3.4; 26 -2.25,-3.4; 27 -1.75,-3.4; 28 -1.25,-3.4; 29 -0.75,-3.4; 30 -0.25,-3.4; 31 0.25,-3.4; 32 0.75,-3.4; 33 1.25,-3.4; 34 1.75,-3.4; 35 2.25,-3.4; 36 2.75,-3.4 | smd 0.6 x 0.24: 13 -3.4,2.75; 14 -3.4,2.25; 15 -3.4,1.75; 16 -3.4,1.25; 17 -3.4,0.75; 18 -3.4,0.25; 19 -3.4,-0.25; 20 -3.4,-0.75; 21 -3.4,-1.25; 22 -3.4,-1.75; 23 -3.4,-2.25; 24 -3.4,-2.75; 37 3.4,-2.75; 38 3.4,-2.25; 39 3.4,-1.75; 40 3.4,-1.25; 41 3.4,-0.75; 42 3.4,-0.25; 43 3.4,0.25; 44 3.4,0.75; 45 3.4,1.25; 46 3.4,1.75; 47 3.4,2.25; 48 3.4,2.75 | smd 4.1 x 4.1: PAD 0,0
WQFN32-5X5 = smd 0.25 x 0.6: 1 1.75,2.4; 2 1.25,2.4; 3 0.75,2.4; 4 0.25,2.4; 5 -0.25,2.4; 6 -0.75,2.4; 7 -1.25,2.4; 8 -1.75,2.4; 17 -1.75,-2.4; 18 -1.25,-2.4; 19 -0.75,-2.4; 20 -0.25,-2.4; 21 0.25,-2.4; 22 0.75,-2.4; 23 1.25,-2.4; 24 1.75,-2.4 | smd 0.6 x 0.25: 9 -2.4,1.75; 10 -2.4,1.25; 11 -2.4,0.75; 12 -2.4,0.25; 13 -2.4,-0.25; 14 -2.4,-0.75; 15 -2.4,-1.25; 16 -2.4,-1.75; 25 2.4,-1.75; 26 2.4,-1.25; 27 2.4,-0.75; 28 2.4,-0.25; 29 2.4,0.25; 30 2.4,0.75; 31 2.4,1.25; 32 2.4,1.75 | smd 3.1 x 3.1: PAD 0,0
CP_40_7 = smd 0.855 x 0.3: 1 -2.927,2.25; 2 -2.927,1.75; 3 -2.927,1.25; 4 -2.927,0.75; 5 -2.927,0.25; 6 -2.927,-0.25; 7 -2.927,-0.75; 8 -2.927,-1.25; 9 -2.927,-1.75; 10 -2.927,-2.25; 21 2.927,-2.25; 22 2.927,-1.75; 23 2.927,-1.25; 24 2.927,-0.75; 25 2.927,-0.25; 26 2.927,0.25; 27 2.927,0.75; 28 2.927,1.25; 29 2.927,1.75; 30 2.927,2.25 | smd 0.3 x 0.855: 11 -2.25,-2.927; 12 -1.75,-2.927; 13 -1.25,-2.927; 14 -0.75,-2.927; 15 -0.25,-2.927; 16 0.25,-2.927; 17 0.75,-2.927; 18 1.25,-2.927; 19 1.75,-2.927; 20 2.25,-2.927; 31 2.25,2.927; 32 1.75,2.927; 33 1.25,2.927; 34 0.75,2.927; 35 0.25,2.927; 36 -0.25,2.927; 37 -0.75,2.927; 38 -1.25,2.927; 39 -1.75,2.927; 40 -2.25,2.927 | smd 4.6 x 4.6: PAD 0,0
TSSOP-8 = smd 0.348 x 1.45: 1 -0.973,-2.95; 2 -0.323,-2.95; 3 0.327,-2.95; 4 0.977,-2.95; 5 0.977,2.95; 6 0.327,2.95; 7 -0.323,2.95; 8 -0.973,2.95
ST_80_2 = smd 1.661 x 0.432: 1 -7.625,6.175; 2 -7.625,5.525; 3 -7.625,4.875; 4 -7.625,4.225; 5 -7.625,3.575; 6 -7.625,2.925; 7 -7.625,2.275; 8 -7.625,1.625; 9 -7.625,0.975; 10 -7.625,0.325; 11 -7.625,-0.325; 12 -7.625,-0.975; 13 -7.625,-1.625; 14 -7.625,-2.275; 15 -7.625,-2.925; 16 -7.625,-3.575; 17 -7.625,-4.225; 18 -7.625,-4.875; 19 -7.625,-5.525; 20 -7.625,-6.175; 41 7.625,-6.175; 42 7.625,-5.525; 43 7.625,-4.875; 44 7.625,-4.225; 45 7.625,-3.575; 46 7.625,-2.925; 47 7.625,-2.275; 48 7.625,-1.625; 49 7.625,-0.975; 50 7.625,-0.325; 51 7.625,0.325; 52 7.625,0.975; 53 7.625,1.625; 54 7.625,2.275; 55 7.625,2.925; 56 7.625,3.575; 57 7.625,4.225; 58 7.625,4.875; 59 7.625,5.525; 60 7.625,6.175 | smd 0.432 x 1.661: 21 -6.175,-7.625; 22 -5.525,-7.625; 23 -4.875,-7.625; 24 -4.225,-7.625; 25 -3.575,-7.625; 26 -2.925,-7.625; 27 -2.275,-7.625; 28 -1.625,-7.625; 29 -0.975,-7.625; 30 -0.325,-7.625; 31 0.325,-7.625; 32 0.975,-7.625; 33 1.625,-7.625; 34 2.275,-7.625; 35 2.925,-7.625; 36 3.575,-7.625; 37 4.225,-7.625; 38 4.875,-7.625; 39 5.525,-7.625; 40 6.175,-7.625; 61 6.175,7.625; 62 5.525,7.625; 63 4.875,7.625; 64 4.225,7.625; 65 3.575,7.625; 66 2.925,7.625; 67 2.275,7.625; 68 1.625,7.625; 69 0.975,7.625; 70 0.325,7.625; 71 -0.325,7.625; 72 -0.975,7.625; 73 -1.625,7.625; 74 -2.275,7.625; 75 -2.925,7.625; 76 -3.575,7.625; 77 -4.225,7.625; 78 -4.875,7.625; 79 -5.525,7.625; 80 -6.175,7.625
TSSOP-16_4.4X5.0 = smd 1.475 x 0.45: 1 -3,2.275; 2 -3,1.625; 3 -3,0.975; 4 -3,0.325; 5 -3,-0.325; 6 -3,-0.975; 7 -3,-1.625; 8 -3,-2.275; 9 3,-2.275; 10 3,-1.625; 11 3,-0.975; 12 3,-0.325; 13 3,0.325; 14 3,0.975; 15 3,1.625; 16 3,2.275
BGA_5X5_625X625 = smd 0.635 x 0.635: A1 -2.54,2.54; A2 -1.27,2.54; A3 0,2.54; A4 1.27,2.54; A5 2.54,2.54; B1 -2.54,1.27; B2 -1.27,1.27; B3 0,1.27; B4 1.27,1.27; B5 2.54,1.27; C1 -2.54,0; C2 -1.27,0; C3 0,0; C4 1.27,0; C5 2.54,0; D1 -2.54,-1.27; D2 -1.27,-1.27; D3 0,-1.27; D4 1.27,-1.27; D5 2.54,-1.27; E1 -2.54,-2.54; E2 -1.27,-2.54; E3 0,-2.54; E4 1.27,-2.54; E5 2.54,-2.54
PVSON-N8+4-3X3 = smd 0.85 x 0.35: 1 -1.475,0.975; 2 -1.475,0.325; 3 -1.475,-0.325; 4 -1.475,-0.975; 5 1.475,-0.975; 6 1.475,-0.325; 7 1.475,0.325; 8 1.475,0.975 | smd 1.5 x 1.75: PAD1 0,0 | smd 0.28 x 1.205: PAD2 -0.325,-1.45; PAD3 -0.325,1.45; PAD4 0.325,1.45; PAD5 0.325,-1.45
TSSOP8 = smd 0.35 x 1.2: 1 -0.975,-2.925; 2 -0.325,-2.925; 3 0.325,-2.925; 4 0.975,-2.925; 5 0.975,2.925; 6 0.325,2.925; 7 -0.325,2.925; 8 -0.975,2.925
LTM8049 = smd 0.63 x 0.63: A1 -3.81,6.35; A2 -2.54,6.35; A3 -1.27,6.35; A4 0,6.35; A5 1.27,6.35; A6 2.54,6.35; A7 3.81,6.35; B1 -3.81,5.08; B2 -2.54,5.08; B3 -1.27,5.08; B4 0,5.08; B5 1.27,5.08; B6 2.54,5.08; B7 3.81,5.08; C1 -3.81,3.81; C2 -2.54,3.81; C3 -1.27,3.81; C4 0,3.81; C5 1.27,3.81; C6 2.54,3.81; C7 3.81,3.81; D1 -3.81,2.54; D2 -2.54,2.54; D3 -1.27,2.54; D4 0,2.54; D5 1.27,2.54; D6 2.54,2.54; D7 3.81,2.54; E1 -3.81,1.27; E2 -2.54,1.27; E3 -1.27,1.27; E4 0,1.27; E5 1.27,1.27; E6 2.54,1.27; E7 3.81,1.27; F1 -3.81,0; F2 -2.54,0; F3 -1.27,0; F4 0,0; F5 1.27,0; F6 2.54,0; F7 3.81,0; G1 -3.81,-1.27; G2 -2.54,-1.27; G3 -1.27,-1.27; G4 0,-1.27; G5 1.27,-1.27; G6 2.54,-1.27; G7 3.81,-1.27; H1 -3.81,-2.54; H2 -2.54,-2.54; H3 -1.27,-2.54; H4 0,-2.54; H5 1.27,-2.54; H6 2.54,-2.54; H7 3.81,-2.54; J1 -3.81,-3.81; J2 -2.54,-3.81; J3 -1.27,-3.81; J4 0,-3.81; J5 1.27,-3.81; J6 2.54,-3.81; J7 3.81,-3.81; K1 -3.81,-5.08; K2 -2.54,-5.08; K3 -1.27,-5.08; K4 0,-5.08; K5 1.27,-5.08; K6 2.54,-5.08; K7 3.81,-5.08; L1 -3.81,-6.35; L2 -2.54,-6.35; L3 -1.27,-6.35; L4 0,-6.35; L5 1.27,-6.35; L6 2.54,-6.35; L7 3.81,-6.35
WSON8-2X2 = smd 0.5 x 0.25: 1 -0.95,0.75; 2 -0.95,0.25; 3 -0.95,-0.25; 4 -0.95,-0.75; 5 0.95,-0.75; 6 0.95,-0.25; 7 0.95,0.25; 8 0.95,0.75 | smd 0.9 x 1.6: PAD 0,0

## Placement (x,y rotation side)
C1  10uF  [1206]  60.35,67.95 270 bottom
C2  10uF  [1206]  40.95,80.9 270 bottom
C3  0.1uF  [0402]  60.65,63.35 90 bottom
C4  0.1uF  [0402]  41.2,75.9 90 bottom
C5  10uF  [1206]  28.2,67.2 90 top
C6  10uF  [1206]  26.3,79.7 0 top
C7  0.1uF  [0402]  27.7,43.4 90 bottom
C8  0.1uF  [0402]  25.8,36.5 90 bottom
C9  0.1uF  [0402]  25.4,29.5 90 bottom
C10  0.1uF  [0402]  25.8,52.9 270 bottom
C11  10nF  [0402]  57.15,59.75 0 bottom
C12  10nF  [0402]  37.65,73.55 0 bottom
C13  0.1uF  [0402]  44.4,55.7 270 top
C14  0.1uF  [0402]  30.6,55.9 270 top
C15  0.1uF  [0402]  30.3,68.6 90 top
C16  0.1uF  [0402]  29.73,77.05 270 top
C17  0.1uF  [0402]  21.4,43.6 90 bottom
C18  0.1uF  [0402]  23.4,36.5 90 bottom
C19  0.1uF  [0402]  23.3,29.5 90 bottom
C20  10nF  [0402]  59.4,63.35 90 bottom
C21  10nF  [0402]  37.65,72.42 0 bottom
C22  0.1uF  [0402]  44.6,58.7 270 bottom
C23  0.1uF  [0402]  31.2,58.5 270 bottom
C24  10nF  [0402]  57.15,60.85 0 bottom
C25  10nF  [0402]  39.92,75.9 90 bottom
C26  10uF  [1206]  33.6,68.4 0 top
C27  10uF  [1206]  34.97,79.95 90 top
C28  4.7nF  [0402]  46.5,21.5 270 bottom
C29  4.7nF  [0402]  43.1,20.3 0 bottom
C30  0.1uF  [0402]  32.64,66.38 0 bottom
C31  0.1uF  [0402]  31.95,77.05 270 top
C32  0.1uF  [0402]  45.4,21.5 270 bottom
C33  0.1uF  [0402]  43.1,19.1 0 bottom
C34  10uF  [1206]  61.8,53.15 0 bottom
C35  10uF  [1206]  63.75,61.65 180 bottom
C36  10uF  [1206]  42.1,65.5 0 bottom
C37  10uF  [1206]  44.35,74.3 180 bottom
C38  47nF  [0402]  55.5,59.1 180 top
C39  47nF  [0402]  35.17,72 180 top
C40  1uF  [0805]  60.3,56.3 270 bottom
C41  0.1uF  [0402]  64.45,59.8 180 bottom
C42  1uF  [0805]  40.8,68.65 270 bottom
C43  0.1uF  [0402]  45.15,72.4 180 bottom
C44  0.1uF  [0402]  55.05,60.4 180 top
C45  0.1uF  [0402]  35.37,73.3 180 top
C46  0.1uF  [0402]  58.7,56.05 270 bottom
C47  0.1uF  [0402]  39.23,68.83 270 bottom
C48  0.1uF  [0402]  57.15,62 0 bottom
C49  0.1uF  [0402]  37.6,69.05 0 bottom
C50  10nF  [0402]  57.05,57.4 0 bottom
C51  10nF  [0402]  37.6,70.2 0 bottom
C52  0.1uF  [0402]  30.4,51.3 180 top
C53  0.1uF  [0402]  57.05,56.25 0 bottom
C54  0.1uF  [0402]  37.65,74.65 0 bottom
C55  0.1uF  [0402]  61.95,55.85 270 bottom
C56  0.1uF  [0402]  42.52,68.67 270 bottom
C57  10nF  [0402]  57.15,63.1 0 bottom
C58  10nF  [0402]  37.65,75.75 0 bottom
C59  10uF  [0805]  31.2,29.6 180 bottom
C60  0.1uF  [0402]  63.45,64.1 90 bottom
C61  0.1uF  [0402]  43.6,76.72 90 bottom
C62  10uF  [0805]  36.8,26.1 90 bottom
C63  0.1uF  [0402]  57.15,58.6 0 bottom
C64  1uF  [0805]  65.2,66.55 270 bottom
C65  0.1uF  [0402]  37.65,71.33 0 bottom
C66  1uF  [0805]  47.24,77.41 0 bottom
C67  0.1uF  [0402]  58.35,64.04 0 top
C68  0.1uF  [0402]  38.9,77 0 top
C69  10uF  [0805]  31.3,37.8 180 bottom
C70  10uF  [1206]  52.65,55.6 180 bottom
C71  10uF  [1206]  68.8,64.85 0 bottom
C72  10uF  [1206]  33.2,68.42 180 bottom
C73  10uF  [1206]  47.8,80 0 bottom
C74  1uF  [0805]  47.5,54.4 180 bottom
C75  1uF  [0805]  60.45,65.95 270 top
C76  1uF  [0805]  41.2,78.65 270 top
C77  10uF  [0805]  36.5,41.3 270 bottom
C78  0.1uF  [0402]  65.26,23.42 0 top
C79  10uF  [1206]  63.05,67.2 270 top
C80  10uF  [1206]  43.75,80.2 270 top
C81  10uF  [1206]  39.1,32.6 90 bottom
C82  10nF  [0402]  66.25,16.18 180 top
C83  0.1uF  [0402]  38.1,41.3 270 bottom
C84  0.1uF  [0402]  31.3,35.8 180 bottom
C85  0.1uF  [0402]  38.5,26 90 bottom
C86  0.1uF  [0402]  64.45,58.55 180 bottom
C87  0.1uF  [0402]  45.15,71.15 180 bottom
C88  1uF  [0805]  37.8,51.4 45 bottom
C89  0.1uF  [0402]  47.4,56.8 0 bottom
C90  0.1uF  [0402]  31.2,31.3 180 bottom
C91  10uF  [1206]  65.2,56.6 180 bottom
C92  10uF  [1206]  45.8,68.95 180 bottom
C93  0.1uF  [0402]  40.9,43.7 45 bottom
C94  47uF  [1210]  54.1,79.4 0 top
C95  10uF  [0805]  40.2,26.1 90 bottom
C96  10uF  [0805]  42.8,45.8 315 bottom
C97  47uF  [1210]  49.7,80.4 90 top
C98  47uF  [1210]  54.05,74.02 0 top
C99  0.1uF  [0402]  41.2,48.4 315 bottom
C100  0.1uF  [0402]  41,29.9 270 bottom
C101  10uF  [0805]  38.9,38.3 0 bottom
C102  47uF  [1210]  52.7,70.15 0 top
C103  10uF  [0805]  37.5,45.4 135 bottom
C104  0.1uF  [0402]  35.7,51.2 225 top
C105  10uF  [0805]  36.3,49.9 45 bottom
C106  10uF  [1206]  50.5,72.25 270 bottom
C107  0.1uF  [0402]  34.1,49.6 45 top
C108  10uF  [0805]  34.8,48.4 45 bottom
C109  10uF  [0805]  46.5,34.7 0 bottom
C110  0.1uF  [0402]  60.4,81.92 270 top
C111  0.1uF  [0402]  69,79.9 90 bottom
C112  0.1uF  [0402]  63.35,72.65 180 top
C113  10uF  [0805]  66.5,79.4 90 bottom
C114  0.1uF  [0402]  46.6,33 0 bottom
C115  0.1uF  [0402]  43.6,29.3 180 bottom
C116  10uF  [0805]  63.35,71 180 top
C117  10uF  [0805]  46.6,31.3 0 bottom
C118  10uF  [1206]  55.3,75 0 bottom
C119  10uF  [0805]  61.9,50.3 0 top
C120  10uF  [0805]  56.4,50.6 0 top
C121  10uF  [0805]  51.9,50.6 180 top
C122  10nF  [0402]  60,42.9 180 top
C123  10nF  [0402]  54.5,43.2 180 top
C124  10nF  [0402]  48.9,43.2 180 top
C125  10uF  [0805]  61.4,41.1 0 top
C126  10uF  [0805]  55.9,41.4 0 top
C127  10uF  [0805]  51.3,41.4 180 top
C128  0.1uF, 500V  [1210]  80,81 180 top
C129  0.1uF, 500V  [1210]  80,18 180 top
C130  47uF  [1210]  61.8,36.8 0 top
C131  47uF  [1210]  53.8,36.9 180 top
C132  0.1uF  [0402]  77.2,65.9 270 bottom
C133  33uF  [1411-VISHAY-B]  82.1,75.8 90 bottom
C134  0.1uF  [0402]  80.47,70.03 270 bottom
C135  0.1uF  [0402]  81.73,68.07 90 bottom
C136  33uF  [1411-VISHAY-B]  76.4,74 90 bottom
C137  0.1uF  [0402]  71.6,74.2 270 bottom
C138  0.1uF  [0402]  72.8,74.2 270 bottom
C139  10uF  [1206]  49.1,29.1 90 top
C140  10uF  [1206]  67.2,28.7 90 top
C141  0.1uF  [0402]  125.9,55.7 270 top
C142  0.1uF  [0402]  112.1,55.9 270 top
C143  0.1uF  [0402]  107.3,52.9 270 bottom
C144  0.1uF  [0402]  126.1,58.7 270 bottom
C145  0.1uF  [0402]  112.7,58.5 270 bottom
C146  0.1uF  [0402]  111.9,51.3 180 top
C147  1uF  [0805]  129,54.4 180 bottom
C148  0.1uF  [0402]  128.9,56.8 0 bottom
C149  0.1uF  [0402]  126.65,71.15 180 bottom
C150  0.1uF  [0402]  120.73,68.83 270 bottom
C151  0.1uF  [0402]  119.15,71.33 0 bottom
C152  10uF  [1206]  114.7,68.42 180 bottom
C153  10nF  [0402]  119.15,72.42 0 bottom
C154  10nF  [0402]  121.42,75.9 90 bottom
C155  10uF  [1206]  127.3,68.95 180 bottom
C156  10nF  [0402]  119.15,73.55 0 bottom
C157  0.1uF  [0402]  122.7,75.9 90 bottom
C158  10uF  [1206]  122.45,80.9 270 bottom
C159  0.1uF  [0402]  125.1,76.72 90 bottom
C160  1uF  [0805]  128.74,77.41 0 bottom
C161  0.1uF  [0402]  124.02,68.67 270 bottom
C162  10uF  [1206]  107.8,79.7 0 top
C163  0.1uF  [0402]  116.87,73.3 180 top
C164  47nF  [0402]  116.67,72 180 top
C165  0.1uF  [0402]  111.23,77.05 270 top
C166  10uF  [1206]  116.47,79.95 90 top
C167  0.1uF  [0402]  113.45,77.05 270 top
C168  10uF  [0805]  144.85,71 180 top
C169  0.1uF  [0402]  141.9,81.92 270 top
C170  0.1uF  [0402]  144.85,72.65 180 top
C171  47uF  [1210]  135.6,79.4 0 top
C172  47uF  [1210]  135.55,74.02 0 top
C173  0.1uF  [0402]  163.23,68.07 90 bottom
C174  0.1uF  [0402]  161.97,70.03 270 bottom
C175  47uF  [1210]  143.3,36.8 0 top
C176  47uF  [1210]  135.3,36.9 180 top
C177  10uF  [1206]  148.7,28.7 90 top
C178  10uF  [1206]  130.6,29.1 90 top
C179  10uF  [0805]  142.9,41.1 0 top
C180  10nF  [0402]  141.5,42.9 180 top
C181  10uF  [0805]  143.4,50.3 0 top
C182  0.1uF  [0402]  125.1,29.3 180 bottom
C183  10uF  [0805]  128.1,31.3 0 bottom
C184  0.1uF  [0402]  128.1,33 0 bottom
C185  10uF  [0805]  112.7,29.6 180 bottom
C186  0.1uF  [0402]  112.7,31.3 180 bottom
C187  10uF  [0805]  121.7,26.1 90 bottom
C188  10uF  [0805]  128,34.7 0 bottom
C189  0.1uF  [0402]  122.5,29.9 270 bottom
C190  10uF  [0805]  120.4,38.3 0 bottom
C191  10uF  [0805]  118.3,26.1 90 bottom
C192  10uF  [0805]  112.8,37.8 180 bottom
C193  10uF  [0805]  118,41.3 270 bottom
C194  0.1uF  [0402]  120,26 90 bottom
C195  0.1uF  [0402]  112.8,35.8 180 bottom
C196  0.1uF  [0402]  119.6,41.3 270 bottom
C197  10uF  [0805]  137.4,41.4 0 top
C198  10nF  [0402]  136,43.2 180 top
C199  10uF  [0805]  137.9,50.6 0 top
C200  10uF  [0805]  132.8,41.4 180 top
C201  10nF  [0402]  130.4,43.2 180 top
C202  10uF  [0805]  133.4,50.6 180 top
C203  10uF  [0805]  124.3,45.8 315 bottom
C204  0.1uF  [0402]  122.4,43.7 45 bottom
C205  1uF  [0805]  119.3,51.4 45 bottom
C206  10uF  [0805]  119,45.4 135 bottom
C207  0.1uF  [0402]  122.7,48.4 315 bottom
C208  10uF  [0805]  117.8,49.9 45 bottom
C209  0.1uF  [0402]  117.2,51.2 225 top
C210  10uF  [0805]  116.3,48.4 45 bottom
C211  0.1uF  [0402]  115.6,49.6 45 top
C212  10uF  [1206]  120.6,32.6 90 bottom
C213  10uF  [0805]  148,79.4 90 bottom
C214  0.1uF  [0402]  150.5,79.9 90 bottom
C215  0.1uF  [0402]  158.7,65.9 270 bottom
C216  0.1uF  [0402]  109.2,43.4 90 bottom
C217  0.1uF  [0402]  102.9,43.6 90 bottom
C218  0.1uF  [0402]  107.3,36.5 90 bottom
C219  0.1uF  [0402]  104.9,36.5 90 bottom
C220  0.1uF  [0402]  106.9,29.5 90 bottom
C221  0.1uF  [0402]  104.8,29.5 90 bottom
C222  0.1uF  [0402]  144.95,64.1 90 bottom
C223  1uF  [0805]  146.7,66.55 270 bottom
C224  0.1uF  [0402]  143.45,55.85 270 bottom
C225  10uF  [1206]  109.7,67.2 90 top
C226  0.1uF  [0402]  136.55,60.4 180 top
C227  47nF  [0402]  137,59.1 180 top
C228  0.1uF  [0402]  111.8,68.6 90 top
C229  10uF  [1206]  115.1,68.4 0 top
C230  0.1uF  [0402]  114.14,66.38 0 bottom
C231  10nF  [0402]  147.75,16.18 180 top
C232  0.1uF  [0402]  146.76,23.42 0 top
C233  0.1uF  [0402]  153.1,74.2 270 bottom
C234  0.1uF  [0402]  154.3,74.2 270 bottom
C235  4.7nF  [0402]  124.6,20.3 0 bottom
C236  4.7nF  [0402]  128,21.5 270 bottom
C237  0.1uF  [0402]  126.9,21.5 270 bottom
C238  0.1uF  [0402]  124.6,19.1 0 bottom
C239  47uF  [1210]  134.2,70.15 0 top
C240  47uF  [1210]  131.2,80.4 90 top
C241  10nF  [0402]  119.15,75.75 0 bottom
C242  0.1uF  [0402]  119.15,74.65 0 bottom
C243  10nF  [0402]  119.1,70.2 0 bottom
C244  0.1uF  [0402]  119.1,69.05 0 bottom
C245  10uF  [1206]  123.6,65.5 0 bottom
C246  1uF  [0805]  122.3,68.65 270 bottom
C247  10uF  [1206]  125.85,74.3 180 bottom
C248  0.1uF  [0402]  126.65,72.4 180 bottom
C249  0.1uF  [0402]  120.4,77 0 top
C250  10uF  [1206]  125.25,80.2 270 top
C251  1uF  [0805]  122.7,78.65 270 top
C252  0.1uF  [0402]  145.95,58.55 180 bottom
C253  0.1uF  [0402]  140.2,56.05 270 bottom
C254  0.1uF  [0402]  138.65,58.6 0 bottom
C255  10uF  [1206]  134.15,55.6 180 bottom
C256  10nF  [0402]  140.9,63.35 90 bottom
C257  10nF  [0402]  138.65,60.85 0 bottom
C258  10uF  [1206]  146.7,56.6 180 bottom
C259  10nF  [0402]  138.65,59.75 0 bottom
C260  0.1uF  [0402]  142.15,63.35 90 bottom
C261  10uF  [1206]  141.85,67.95 270 bottom
C262  10nF  [0402]  138.65,63.1 0 bottom
C263  0.1uF  [0402]  138.55,56.25 0 bottom
C264  10nF  [0402]  138.55,57.4 0 bottom
C265  0.1uF  [0402]  138.65,62 0 bottom
C266  10uF  [1206]  143.3,53.15 0 bottom
C267  1uF  [0805]  141.8,56.3 270 bottom
C268  10uF  [1206]  145.25,61.65 180 bottom
C269  0.1uF  [0402]  145.95,59.8 180 bottom
C270  0.1uF  [0402]  139.85,64.04 0 top
C271  10uF  [1206]  144.55,67.2 270 top
C272  1uF  [0805]  141.95,65.95 270 top
C273  10uF  [1206]  129.3,80 0 bottom
C274  10uF  [1206]  150.3,64.85 0 bottom
C275  10uF  [1206]  136.8,75 0 bottom
C276  10uF  [1206]  132,72.25 270 bottom
C277  0.1uF, 500V  [1210]  161.5,81 180 top
C278  0.1uF, 500V  [1210]  161.5,18 180 top
C279  33uF  [1411-VISHAY-B]  157.9,74 90 bottom
C280  33uF  [1411-VISHAY-B]  163.6,75.8 90 bottom
C281  0.1uF  [0402]  44.4,129.7 270 top
C282  0.1uF  [0402]  30.6,129.9 270 top
C283  0.1uF  [0402]  25.8,126.9 270 bottom
C284  0.1uF  [0402]  44.6,132.7 270 bottom
C285  0.1uF  [0402]  31.2,132.5 270 bottom
C286  0.1uF  [0402]  30.4,125.3 180 top
C287  1uF  [0805]  47.5,128.4 180 bottom
C288  0.1uF  [0402]  47.4,130.8 0 bottom
C289  0.1uF  [0402]  45.15,145.15 180 bottom
C290  0.1uF  [0402]  39.23,142.83 270 bottom
C291  0.1uF  [0402]  37.65,145.33 0 bottom
C292  10uF  [1206]  33.2,142.42 180 bottom
C293  10nF  [0402]  37.65,146.42 0 bottom
C294  10nF  [0402]  39.92,149.9 90 bottom
C295  10uF  [1206]  45.8,142.95 180 bottom
C296  10nF  [0402]  37.65,147.55 0 bottom
C297  0.1uF  [0402]  41.2,149.9 90 bottom
C298  10uF  [1206]  40.95,154.9 270 bottom
C299  0.1uF  [0402]  43.6,150.72 90 bottom
C300  1uF  [0805]  47.24,151.41 0 bottom
C301  0.1uF  [0402]  42.52,142.67 270 bottom
C302  10uF  [1206]  26.3,153.7 0 top
C303  0.1uF  [0402]  35.37,147.3 180 top
C304  47nF  [0402]  35.17,146 180 top
C305  0.1uF  [0402]  29.73,151.05 270 top
C306  10uF  [1206]  34.97,153.95 90 top
C307  0.1uF  [0402]  31.95,151.05 270 top
C308  10uF  [0805]  63.35,145 180 top
C309  0.1uF  [0402]  60.4,155.92 270 top
C310  0.1uF  [0402]  63.35,146.65 180 top
C311  47uF  [1210]  54.1,153.4 0 top
C312  47uF  [1210]  54.05,148.02 0 top
C313  0.1uF  [0402]  81.73,142.07 90 bottom
C314  0.1uF  [0402]  80.47,144.03 270 bottom
C315  47uF  [1210]  61.8,110.8 0 top
C316  47uF  [1210]  53.8,110.9 180 top
C317  10uF  [1206]  67.2,102.7 90 top
C318  10uF  [1206]  49.1,103.1 90 top
C319  10uF  [0805]  61.4,115.1 0 top
C320  10nF  [0402]  60,116.9 180 top
C321  10uF  [0805]  61.9,124.3 0 top
C322  0.1uF  [0402]  43.6,103.3 180 bottom
C323  10uF  [0805]  46.6,105.3 0 bottom
C324  0.1uF  [0402]  46.6,107 0 bottom
C325  10uF  [0805]  31.2,103.6 180 bottom
C326  0.1uF  [0402]  31.2,105.3 180 bottom
C327  10uF  [0805]  40.2,100.1 90 bottom
C328  10uF  [0805]  46.5,108.7 0 bottom
C329  0.1uF  [0402]  41,103.9 270 bottom
C330  10uF  [0805]  38.9,112.3 0 bottom
C331  10uF  [0805]  36.8,100.1 90 bottom
C332  10uF  [0805]  31.3,111.8 180 bottom
C333  10uF  [0805]  36.5,115.3 270 bottom
C334  0.1uF  [0402]  38.5,100 90 bottom
C335  0.1uF  [0402]  31.3,109.8 180 bottom
C336  0.1uF  [0402]  38.1,115.3 270 bottom
C337  10uF  [0805]  55.9,115.4 0 top
C338  10nF  [0402]  54.5,117.2 180 top
C339  10uF  [0805]  56.4,124.6 0 top
C340  10uF  [0805]  51.3,115.4 180 top
C341  10nF  [0402]  48.9,117.2 180 top
C342  10uF  [0805]  51.9,124.6 180 top
C343  10uF  [0805]  42.8,119.8 315 bottom
C344  0.1uF  [0402]  40.9,117.7 45 bottom
C345  1uF  [0805]  37.8,125.4 45 bottom
C346  10uF  [0805]  37.5,119.4 135 bottom
C347  0.1uF  [0402]  41.2,122.4 315 bottom
C348  10uF  [0805]  36.3,123.9 45 bottom
C349  0.1uF  [0402]  35.7,125.2 225 top
C350  10uF  [0805]  34.8,122.4 45 bottom
C351  0.1uF  [0402]  34.1,123.6 45 top
C352  10uF  [1206]  39.1,106.6 90 bottom
C353  10uF  [0805]  66.5,153.4 90 bottom
C354  0.1uF  [0402]  69,153.9 90 bottom
C355  0.1uF  [0402]  77.2,139.9 270 bottom
C356  0.1uF  [0402]  27.7,117.4 90 bottom
C357  0.1uF  [0402]  21.4,117.6 90 bottom
C358  0.1uF  [0402]  25.8,110.5 90 bottom
C359  0.1uF  [0402]  23.4,110.5 90 bottom
C360  0.1uF  [0402]  25.4,103.5 90 bottom
C361  0.1uF  [0402]  23.3,103.5 90 bottom
C362  0.1uF  [0402]  63.45,138.1 90 bottom
C363  1uF  [0805]  65.2,140.55 270 bottom
C364  0.1uF  [0402]  61.95,129.85 270 bottom
C365  10uF  [1206]  28.2,141.2 90 top
C366  0.1uF  [0402]  55.05,134.4 180 top
C367  47nF  [0402]  55.5,133.1 180 top
C368  0.1uF  [0402]  30.3,142.6 90 top
C369  10uF  [1206]  33.6,142.4 0 top
C370  0.1uF  [0402]  32.64,140.38 0 bottom
C371  10nF  [0402]  66.25,90.18 180 top
C372  0.1uF  [0402]  65.26,97.42 0 top
C373  0.1uF  [0402]  71.6,148.2 270 bottom
C374  0.1uF  [0402]  72.8,148.2 270 bottom
C375  4.7nF  [0402]  43.1,94.3 0 bottom
C376  4.7nF  [0402]  46.5,95.5 270 bottom
C377  0.1uF  [0402]  45.4,95.5 270 bottom
C378  0.1uF  [0402]  43.1,93.1 0 bottom
C379  47uF  [1210]  52.7,144.15 0 top
C380  47uF  [1210]  49.7,154.4 90 top
C381  10nF  [0402]  37.65,149.75 0 bottom
C382  0.1uF  [0402]  37.65,148.65 0 bottom
C383  10nF  [0402]  37.6,144.2 0 bottom
C384  0.1uF  [0402]  37.6,143.05 0 bottom
C385  10uF  [1206]  42.1,139.5 0 bottom
C386  1uF  [0805]  40.8,142.65 270 bottom
C387  10uF  [1206]  44.35,148.3 180 bottom
C388  0.1uF  [0402]  45.15,146.4 180 bottom
C389  0.1uF  [0402]  38.9,151 0 top
C390  10uF  [1206]  43.75,154.2 270 top
C391  1uF  [0805]  41.2,152.65 270 top
C392  0.1uF  [0402]  64.45,132.55 180 bottom
C393  0.1uF  [0402]  58.7,130.05 270 bottom
C394  0.1uF  [0402]  57.15,132.6 0 bottom
C395  10uF  [1206]  52.65,129.6 180 bottom
C396  10nF  [0402]  59.4,137.35 90 bottom
C397  10nF  [0402]  57.15,134.85 0 bottom
C398  10uF  [1206]  65.2,130.6 180 bottom
C399  10nF  [0402]  57.15,133.75 0 bottom
C400  0.1uF  [0402]  60.65,137.35 90 bottom
C401  10uF  [1206]  60.35,141.95 270 bottom
C402  10nF  [0402]  57.15,137.1 0 bottom
C403  0.1uF  [0402]  57.05,130.25 0 bottom
C404  10nF  [0402]  57.05,131.4 0 bottom
C405  0.1uF  [0402]  57.15,136 0 bottom
C406  10uF  [1206]  61.8,127.15 0 bottom
C407  1uF  [0805]  60.3,130.3 270 bottom
C408  10uF  [1206]  63.75,135.65 180 bottom
C409  0.1uF  [0402]  64.45,133.8 180 bottom
C410  0.1uF  [0402]  58.35,138.04 0 top
C411  10uF  [1206]  63.05,141.2 270 top
C412  1uF  [0805]  60.45,139.95 270 top
C413  10uF  [1206]  47.8,154 0 bottom
C414  10uF  [1206]  68.8,138.85 0 bottom
C415  10uF  [1206]  55.3,149 0 bottom
C416  10uF  [1206]  50.5,146.25 270 bottom
C417  0.1uF, 500V  [1210]  80,155 180 top
C418  0.1uF, 500V  [1210]  80,92 180 top
C419  33uF  [1411-VISHAY-B]  76.4,148 90 bottom
C420  33uF  [1411-VISHAY-B]  82.1,149.8 90 bottom
C421  0.1uF  [0402]  125.9,129.7 270 top
C422  0.1uF  [0402]  112.1,129.9 270 top
C423  0.1uF  [0402]  107.3,126.9 270 bottom
C424  0.1uF  [0402]  126.1,132.7 270 bottom
C425  0.1uF  [0402]  112.7,132.5 270 bottom
C426  0.1uF  [0402]  111.9,125.3 180 top
C427  1uF  [0805]  129,128.4 180 bottom
C428  0.1uF  [0402]  128.9,130.8 0 bottom
C429  0.1uF  [0402]  126.65,145.15 180 bottom
C430  0.1uF  [0402]  120.73,142.83 270 bottom
C431  0.1uF  [0402]  119.15,145.33 0 bottom
C432  10uF  [1206]  114.7,142.42 180 bottom
C433  10nF  [0402]  119.15,146.42 0 bottom
C434  10nF  [0402]  121.42,149.9 90 bottom
C435  10uF  [1206]  127.3,142.95 180 bottom
C436  10nF  [0402]  119.15,147.55 0 bottom
C437  0.1uF  [0402]  122.7,149.9 90 bottom
C438  10uF  [1206]  122.45,154.9 270 bottom
C439  0.1uF  [0402]  125.1,150.72 90 bottom
C440  1uF  [0805]  128.74,151.41 0 bottom
C441  0.1uF  [0402]  124.02,142.67 270 bottom
C442  10uF  [1206]  107.8,153.7 0 top
C443  0.1uF  [0402]  116.87,147.3 180 top
C444  47nF  [0402]  116.67,146 180 top
C445  0.1uF  [0402]  111.23,151.05 270 top
C446  10uF  [1206]  116.47,153.95 90 top
C447  0.1uF  [0402]  113.45,151.05 270 top
C448  10uF  [0805]  144.85,145 180 top
C449  0.1uF  [0402]  141.9,155.92 270 top
C450  0.1uF  [0402]  144.85,146.65 180 top
C451  47uF  [1210]  135.6,153.4 0 top
C452  47uF  [1210]  135.55,148.02 0 top
C453  0.1uF  [0402]  163.23,142.07 90 bottom
C454  0.1uF  [0402]  161.97,144.03 270 bottom
C455  47uF  [1210]  143.3,110.8 0 top
C456  47uF  [1210]  135.3,110.9 180 top
C457  10uF  [1206]  148.7,102.7 90 top
C458  10uF  [1206]  130.6,103.1 90 top
C459  10uF  [0805]  142.9,115.1 0 top
C460  10nF  [0402]  141.5,116.9 180 top
C461  10uF  [0805]  143.4,124.3 0 top
C462  0.1uF  [0402]  125.1,103.3 180 bottom
C463  10uF  [0805]  128.1,105.3 0 bottom
C464  0.1uF  [0402]  128.1,107 0 bottom
C465  10uF  [0805]  112.7,103.6 180 bottom
C466  0.1uF  [0402]  112.7,105.3 180 bottom
C467  10uF  [0805]  121.7,100.1 90 bottom
C468  10uF  [0805]  128,108.7 0 bottom
C469  0.1uF  [0402]  122.5,103.9 270 bottom
C470  10uF  [0805]  120.4,112.3 0 bottom
C471  10uF  [0805]  118.3,100.1 90 bottom
C472  10uF  [0805]  112.8,111.8 180 bottom
C473  10uF  [0805]  118,115.3 270 bottom
C474  0.1uF  [0402]  120,100 90 bottom
C475  0.1uF  [0402]  112.8,109.8 180 bottom
C476  0.1uF  [0402]  119.6,115.3 270 bottom
C477  10uF  [0805]  137.4,115.4 0 top
C478  10nF  [0402]  136,117.2 180 top
C479  10uF  [0805]  137.9,124.6 0 top
C480  10uF  [0805]  132.8,115.4 180 top
C481  10nF  [0402]  130.4,117.2 180 top
C482  10uF  [0805]  133.4,124.6 180 top
C483  10uF  [0805]  124.3,119.8 315 bottom
C484  0.1uF  [0402]  122.4,117.7 45 bottom
C485  1uF  [0805]  119.3,125.4 45 bottom
C486  10uF  [0805]  119,119.4 135 bottom
C487  0.1uF  [0402]  122.7,122.4 315 bottom
C488  10uF  [0805]  117.8,123.9 45 bottom
C489  0.1uF  [0402]  117.2,125.2 225 top
C490  10uF  [0805]  116.3,122.4 45 bottom
C491  0.1uF  [0402]  115.6,123.6 45 top
C492  10uF  [1206]  120.6,106.6 90 bottom
C493  10uF  [0805]  148,153.4 90 bottom
C494  0.1uF  [0402]  150.5,153.9 90 bottom
C495  0.1uF  [0402]  158.7,139.9 270 bottom
C496  0.1uF  [0402]  109.2,117.4 90 bottom
C497  0.1uF  [0402]  102.9,117.6 90 bottom
C498  0.1uF  [0402]  107.3,110.5 90 bottom
C499  0.1uF  [0402]  104.9,110.5 90 bottom
C500  0.1uF  [0402]  106.9,103.5 90 bottom
C501  0.1uF  [0402]  104.8,103.5 90 bottom
C502  0.1uF  [0402]  144.95,138.1 90 bottom
C503  1uF  [0805]  146.7,140.55 270 bottom
C504  0.1uF  [0402]  143.45,129.85 270 bottom
C505  10uF  [1206]  109.7,141.2 90 top
C506  0.1uF  [0402]  136.55,134.4 180 top
C507  47nF  [0402]  137,133.1 180 top
C508  0.1uF  [0402]  111.8,142.6 90 top
C509  10uF  [1206]  115.1,142.4 0 top
C510  0.1uF  [0402]  114.14,140.38 0 bottom
C511  10nF  [0402]  147.75,90.18 180 top
C512  0.1uF  [0402]  146.76,97.42 0 top
C513  0.1uF  [0402]  153.1,148.2 270 bottom
C514  0.1uF  [0402]  154.3,148.2 270 bottom
C515  4.7nF  [0402]  124.6,94.3 0 bottom
C516  4.7nF  [0402]  128,95.5 270 bottom
C517  0.1uF  [0402]  126.9,95.5 270 bottom
C518  0.1uF  [0402]  124.6,93.1 0 bottom
C519  47uF  [1210]  134.2,144.15 0 top
C520  47uF  [1210]  131.2,154.4 90 top
C521  10nF  [0402]  119.15,149.75 0 bottom
C522  0.1uF  [0402]  119.15,148.65 0 bottom
C523  10nF  [0402]  119.1,144.2 0 bottom
C524  0.1uF  [0402]  119.1,143.05 0 bottom
C525  10uF  [1206]  123.6,139.5 0 bottom
C526  1uF  [0805]  122.3,142.65 270 bottom
C527  10uF  [1206]  125.85,148.3 180 bottom
C528  0.1uF  [0402]  126.65,146.4 180 bottom
C529  0.1uF  [0402]  120.4,151 0 top
C530  10uF  [1206]  125.25,154.2 270 top
C531  1uF  [0805]  122.7,152.65 270 top
C532  0.1uF  [0402]  145.95,132.55 180 bottom
C533  0.1uF  [0402]  140.2,130.05 270 bottom
C534  0.1uF  [0402]  138.65,132.6 0 bottom
C535  10uF  [1206]  134.15,129.6 180 bottom
C536  10nF  [0402]  140.9,137.35 90 bottom
C537  10nF  [0402]  138.65,134.85 0 bottom
C538  10uF  [1206]  146.7,130.6 180 bottom
C539  10nF  [0402]  138.65,133.75 0 bottom
C540  0.1uF  [0402]  142.15,137.35 90 bottom
C541  10uF  [1206]  141.85,141.95 270 bottom
C542  10nF  [0402]  138.65,137.1 0 bottom
C543  0.1uF  [0402]  138.55,130.25 0 bottom
C544  10nF  [0402]  138.55,131.4 0 bottom
C545  0.1uF  [0402]  138.65,136 0 bottom
C546  10uF  [1206]  143.3,127.15 0 bottom
C547  1uF  [0805]  141.8,130.3 270 bottom
C548  10uF  [1206]  145.25,135.65 180 bottom
C549  0.1uF  [0402]  145.95,133.8 180 bottom
C550  0.1uF  [0402]  139.85,138.04 0 top
C551  10uF  [1206]  144.55,141.2 270 top
C552  1uF  [0805]  141.95,139.95 270 top
C553  10uF  [1206]  129.3,154 0 bottom
C554  10uF  [1206]  150.3,138.85 0 bottom
C555  10uF  [1206]  136.8,149 0 bottom
C556  10uF  [1206]  132,146.25 270 bottom
C557  0.1uF, 500V  [1210]  161.5,155 180 top
C558  0.1uF, 500V  [1210]  161.5,92 180 top
C559  33uF  [1411-VISHAY-B]  157.9,148 90 bottom
C560  33uF  [1411-VISHAY-B]  163.6,149.8 90 bottom
D1  SESD0402X1UN-0020-090  [0402P-DFN]  14.5,64.7 0 top
D2  SESD0402X1UN-0020-090  [0402P-DFN]  14.3,70.1 0 top
D3  BAR66  [SOT23]  21.9,51.57 180 top
D4  BAR66  [SOT23]  35.7,55.4 90 top
D5  BAR66  [SOT23]  21.9,55.4 90 top
D6  KDZ4.3B  [SOD123]  28.1,52.4 270 top
D7  KDZ4.3B  [SOD123]  109.6,52.4 270 top
D8  BAR66  [SOT23]  117.2,55.4 90 top
D9  BAR66  [SOT23]  103.4,55.4 90 top
D10  BAR66  [SOT23]  103.4,51.57 180 top
D11  SESD0402X1UN-0020-090  [0402P-DFN]  95.8,70.1 0 top
D12  SESD0402X1UN-0020-090  [0402P-DFN]  96,64.7 0 top
D13  KDZ4.3B  [SOD123]  28.1,126.4 270 top
D14  BAR66  [SOT23]  35.7,129.4 90 top
D15  BAR66  [SOT23]  21.9,129.4 90 top
D16  BAR66  [SOT23]  21.9,125.57 180 top
D17  SESD0402X1UN-0020-090  [0402P-DFN]  14.3,144.1 0 top
D18  SESD0402X1UN-0020-090  [0402P-DFN]  14.5,138.7 0 top
D19  KDZ4.3B  [SOD123]  109.6,126.4 270 top
D20  BAR66  [SOT23]  117.2,129.4 90 top
D21  BAR66  [SOT23]  103.4,129.4 90 top
D22  BAR66  [SOT23]  103.4,125.57 180 top
D23  SESD0402X1UN-0020-090  [0402P-DFN]  95.8,144.1 0 top
D24  SESD0402X1UN-0020-090  [0402P-DFN]  96,138.7 0 top
E$1  [FIDUCIAL]  159.4,12 0 top
E$2  [FIDUCIAL]  146.4,161 180 top
E$3  [FIDUCIAL]  15.4,12 0 top
E$4  [FIDUCIAL]  15.4,12 0 bottom
E$5  [FIDUCIAL]  159.4,12 0 bottom
E$6  [FIDUCIAL]  146.4,161 180 bottom
F1  C014F-2  [1812]  16.3,61.9 0 top
F2  C014F-2  [1812]  16.3,58.1 0 top
F3  C014F-2  [1812]  16.3,54.3 0 top
F4  C014F-2  [1812]  97.8,54.3 0 top
F5  C014F-2  [1812]  97.8,61.9 0 top
F6  C014F-2  [1812]  97.8,58.1 0 top
F7  C014F-2  [1812]  16.3,128.3 0 top
F8  C014F-2  [1812]  16.3,135.9 0 top
F9  C014F-2  [1812]  16.3,132.1 0 top
F10  C014F-2  [1812]  97.8,128.3 0 top
F11  C014F-2  [1812]  97.8,135.9 0 top
F12  C014F-2  [1812]  97.8,132.1 0 top
J1  SMA002  [MMCX-THRU]  10.5,67.5 90 top
J2  SMA002  [MMCX-THRU]  10.5,72.5 90 top
J3  SMA002  [MMCX-THRU]  10.5,62.5 90 top
J4  SMA002  [MMCX-THRU]  10.5,58 90 top
J5  SMA002  [MMCX-THRU]  10.5,53.5 90 top
J6  FTSH-105-01-F-D-RA-K  [FTSH-105-01-F-D-RA-K]  55.27,22.13 180 bottom
J7  12226-8250-00FR  [12226-82X0-00XX]  13.1,37.5 270 top
J8  FMC_SINGLE_WIDTH_MODULE  [FMC_SINGLE_WIDTH_MODULE]  74,18 0 top
J9  ASP-134488-01  [FMC_HPC_MALE]  76,49.5 270 top
J10  BM08B-SURS-TF  [BM08B-SURS-TF]  67,45.4 90 top
J11  SMA002  [MMCX-THRU]  92,62.5 90 top
J12  SMA002  [MMCX-THRU]  92,53.5 90 top
J13  SMA002  [MMCX-THRU]  92,58 90 top
J14  SMA002  [MMCX-THRU]  92,72.5 90 top
J15  FMC_SINGLE_WIDTH_MODULE  [FMC_SINGLE_WIDTH_MODULE]  155.5,18 0 top
J16  12226-8250-00FR  [12226-82X0-00XX]  94.6,37.5 270 top
J17  ASP-134488-01  [FMC_HPC_MALE]  157.5,49.5 270 top
J18  SMA002  [MMCX-THRU]  92,67.5 90 top
J19  FTSH-105-01-F-D-RA-K  [FTSH-105-01-F-D-RA-K]  136.77,22.13 180 bottom
J20  BM08B-SURS-TF  [BM08B-SURS-TF]  148.5,45.4 90 top
J21  SMA002  [MMCX-THRU]  10.5,136.5 90 top
J22  SMA002  [MMCX-THRU]  10.5,127.5 90 top
J23  SMA002  [MMCX-THRU]  10.5,132 90 top
J24  SMA002  [MMCX-THRU]  10.5,146.5 90 top
J25  FMC_SINGLE_WIDTH_MODULE  [FMC_SINGLE_WIDTH_MODULE]  74,92 0 top
J26  12226-8250-00FR  [12226-82X0-00XX]  13.1,111.5 270 top
J27  ASP-134488-01  [FMC_HPC_MALE]  76,123.5 270 top
J28  SMA002  [MMCX-THRU]  10.5,141.5 90 top
J29  FTSH-105-01-F-D-RA-K  [FTSH-105-01-F-D-RA-K]  55.27,96.13 180 bottom
J30  BM08B-SURS-TF  [BM08B-SURS-TF]  67,119.4 90 top
J31  SMA002  [MMCX-THRU]  92,136.5 90 top
J32  SMA002  [MMCX-THRU]  92,127.5 90 top
J33  SMA002  [MMCX-THRU]  92,132 90 top
J34  SMA002  [MMCX-THRU]  92,146.5 90 top
J35  FMC_SINGLE_WIDTH_MODULE  [FMC_SINGLE_WIDTH_MODULE]  155.5,92 0 top
J36  12226-8250-00FR  [12226-82X0-00XX]  94.6,111.5 270 top
J37  ASP-134488-01  [FMC_HPC_MALE]  157.5,123.5 270 top
J38  SMA002  [MMCX-THRU]  92,141.5 90 top
J39  FTSH-105-01-F-D-RA-K  [FTSH-105-01-F-D-RA-K]  136.77,96.13 180 bottom
J40  BM08B-SURS-TF  [BM08B-SURS-TF]  148.5,119.4 90 top
L1  1008PS-472  [1008PS]  14.8,67.2 0 top
L2  1008PS-472  [1008PS]  14.7,72.6 0 top
L3  BLM18KG601SN1D  [0603]  57.9,67.05 270 bottom
L4  BLM18KG601SN1D  [0603]  38.07,79.95 270 bottom
L5  SRNxx-101M  [SRN6045TA]  23.5,67.4 270 top
L6  SRNxx-101M  [SRN6045TA]  25.4,75.3 270 top
L7  MPZ2012S102AT000  [0805]  31.3,65.7 180 top
L8  MPZ2012S102AT000  [0805]  30.83,79.63 180 top
L9  BLM18KG601SN1D  [0603]  53.1,57.7 180 bottom
L10  BLM18KG601SN1D  [0603]  33.77,70.47 180 bottom
L11  BLM18KG601SN1D  [0603]  62.95,67 270 bottom
L12  BLM18KG601SN1D  [0603]  43.6,79.5 270 bottom
L13  1277AS-H-6R8M=P2  [1210]  54.25,68.9 180 bottom
L14  BLM15PX601SN1D  [0402]  42.9,36.7 180 bottom
L15  BLM15PX601SN1D  [0402]  40,52.9 45 top
L16  BLM15PX601SN1D  [0402]  40.9,52 45 top
L17  BLM15PX601SN1D  [0402]  66.3,37.4 270 top
L18  BLM15PX601SN1D  [0402]  65,37.4 270 top
L19  BLM15PX601SN1D  [0402]  57,37.5 270 top
L20  1008PS-472  [1008PS]  96.2,72.6 0 top
L21  SRNxx-101M  [SRN6045TA]  106.9,75.3 270 top
L22  MPZ2012S102AT000  [0805]  112.33,79.63 180 top
L23  BLM18KG601SN1D  [0603]  119.57,79.95 270 bottom
L24  BLM18KG601SN1D  [0603]  115.27,70.47 180 bottom
L25  BLM15PX601SN1D  [0402]  147.8,37.4 270 top
L26  BLM15PX601SN1D  [0402]  146.5,37.4 270 top
L27  BLM15PX601SN1D  [0402]  138.5,37.5 270 top
L28  BLM15PX601SN1D  [0402]  124.4,36.7 180 bottom
L29  BLM15PX601SN1D  [0402]  121.5,52.9 45 top
L30  BLM15PX601SN1D  [0402]  122.4,52 45 top
L31  1008PS-472  [1008PS]  96.3,67.2 0 top
L32  SRNxx-101M  [SRN6045TA]  105,67.4 270 top
L33  MPZ2012S102AT000  [0805]  112.8,65.7 180 top
L34  BLM18KG601SN1D  [0603]  125.1,79.5 270 bottom
L35  BLM18KG601SN1D  [0603]  144.45,67 270 bottom
L36  BLM18KG601SN1D  [0603]  139.4,67.05 270 bottom
L37  BLM18KG601SN1D  [0603]  134.6,57.7 180 bottom
L38  1277AS-H-6R8M=P2  [1210]  135.75,68.9 180 bottom
L39  1008PS-472  [1008PS]  14.7,146.6 0 top
L40  SRNxx-101M  [SRN6045TA]  25.4,149.3 270 top
L41  MPZ2012S102AT000  [0805]  30.83,153.63 180 top
L42  BLM18KG601SN1D  [0603]  38.07,153.95 270 bottom
L43  BLM18KG601SN1D  [0603]  33.77,144.47 180 bottom
L44  BLM15PX601SN1D  [0402]  66.3,111.4 270 top
L45  BLM15PX601SN1D  [0402]  65,111.4 270 top
L46  BLM15PX601SN1D  [0402]  57,111.5 270 top
L47  BLM15PX601SN1D  [0402]  42.9,110.7 180 bottom
L48  BLM15PX601SN1D  [0402]  40,126.9 45 top
L49  BLM15PX601SN1D  [0402]  40.9,126 45 top
L50  1008PS-472  [1008PS]  14.8,141.2 0 top
L51  SRNxx-101M  [SRN6045TA]  23.5,141.4 270 top
L52  MPZ2012S102AT000  [0805]  31.3,139.7 180 top
L53  BLM18KG601SN1D  [0603]  43.6,153.5 270 bottom
L54  BLM18KG601SN1D  [0603]  62.95,141 270 bottom
L55  BLM18KG601SN1D  [0603]  57.9,141.05 270 bottom
L56  BLM18KG601SN1D  [0603]  53.1,131.7 180 bottom
L57  1277AS-H-6R8M=P2  [1210]  54.25,142.9 180 bottom
L58  1008PS-472  [1008PS]  96.2,146.6 0 top
L59  SRNxx-101M  [SRN6045TA]  106.9,149.3 270 top
L60  MPZ2012S102AT000  [0805]  112.33,153.63 180 top
L61  BLM18KG601SN1D  [0603]  119.57,153.95 270 bottom
L62  BLM18KG601SN1D  [0603]  115.27,144.47 180 bottom
L63  BLM15PX601SN1D  [0402]  147.8,111.4 270 top
L64  BLM15PX601SN1D  [0402]  146.5,111.4 270 top
L65  BLM15PX601SN1D  [0402]  138.5,111.5 270 top
L66  BLM15PX601SN1D  [0402]  124.4,110.7 180 bottom
L67  BLM15PX601SN1D  [0402]  121.5,126.9 45 top
L68  BLM15PX601SN1D  [0402]  122.4,126 45 top
L69  1008PS-472  [1008PS]  96.3,141.2 0 top
L70  SRNxx-101M  [SRN6045TA]  105,141.4 270 top
L71  MPZ2012S102AT000  [0805]  112.8,139.7 180 top
L72  BLM18KG601SN1D  [0603]  125.1,153.5 270 bottom
L73  BLM18KG601SN1D  [0603]  144.45,141 270 bottom
L74  BLM18KG601SN1D  [0603]  139.4,141.05 270 bottom
L75  BLM18KG601SN1D  [0603]  134.6,131.7 180 bottom
L76  1277AS-H-6R8M=P2  [1210]  135.75,142.9 180 bottom
Q1  SI1012R  [SC75]  39.5,56 90 top
Q2  SI1012R  [SC75]  25.8,56 90 top
Q3  SI1012R  [SC75]  121,56 90 top
Q4  SI1012R  [SC75]  107.3,56 90 top
Q5  SI1012R  [SC75]  39.5,130 90 top
Q6  SI1012R  [SC75]  25.8,130 90 top
Q7  SI1012R  [SC75]  121,130 90 top